# Altium PCB LD-Shoushi-V2.31-0907.pcbdoc
Units mil, origin at the board's own origin, x right, y up, seen from the top; angles counter-clockwise.
Board outline 2992.13 x 2992.13 mil, 4 copper layers (Top Layer, GND, SIGNAL, Bottom Layer), stack 67.335 mil thick; 68 components, 47 nets, 220 pads, 80 vias.
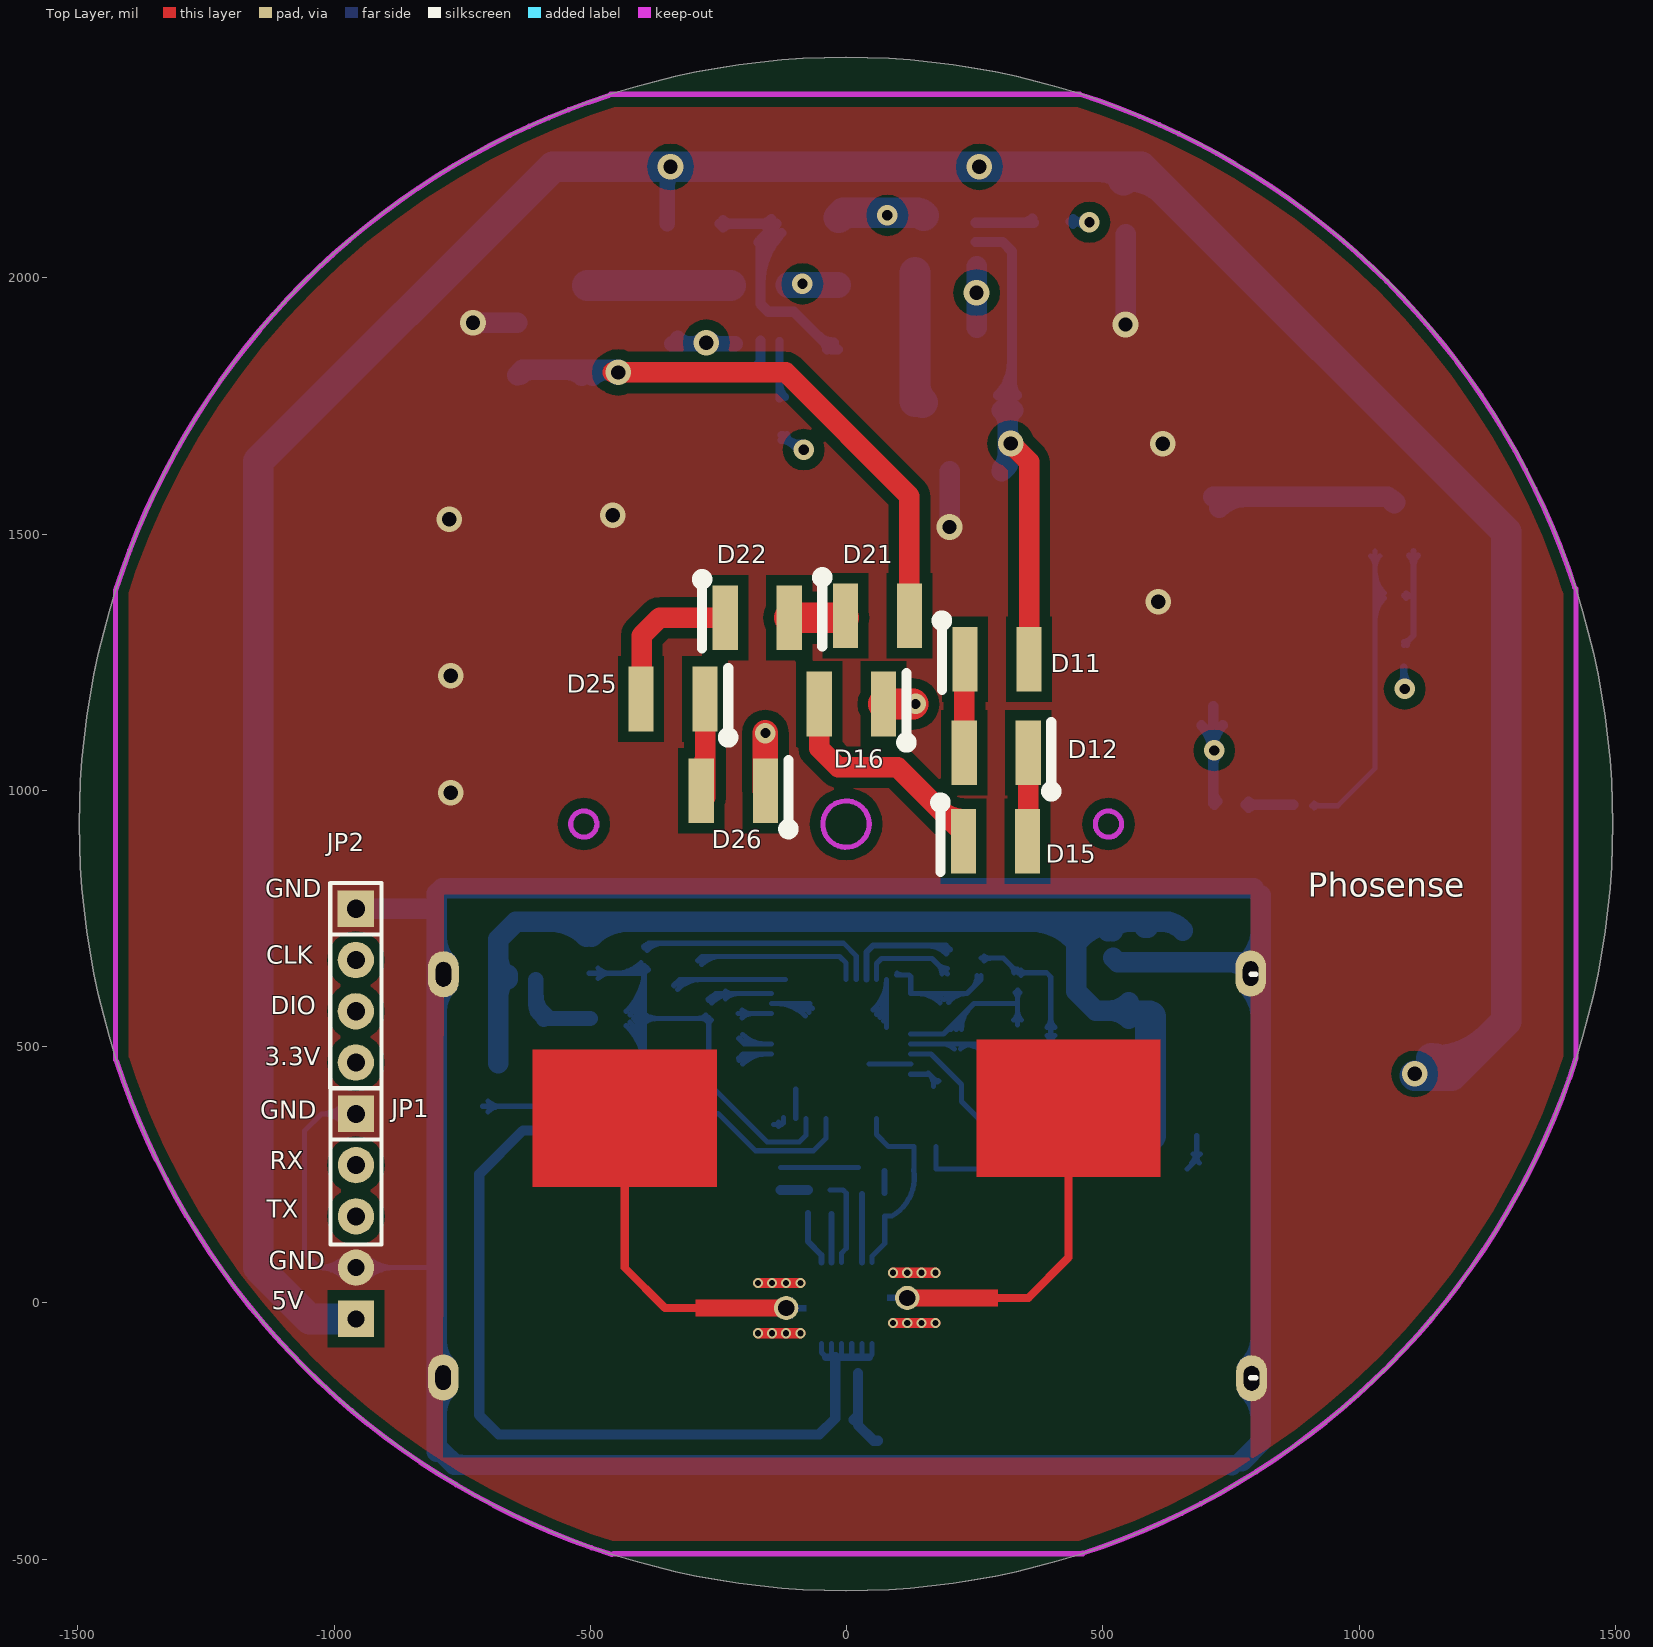
[diagram p0: Top Layer view]
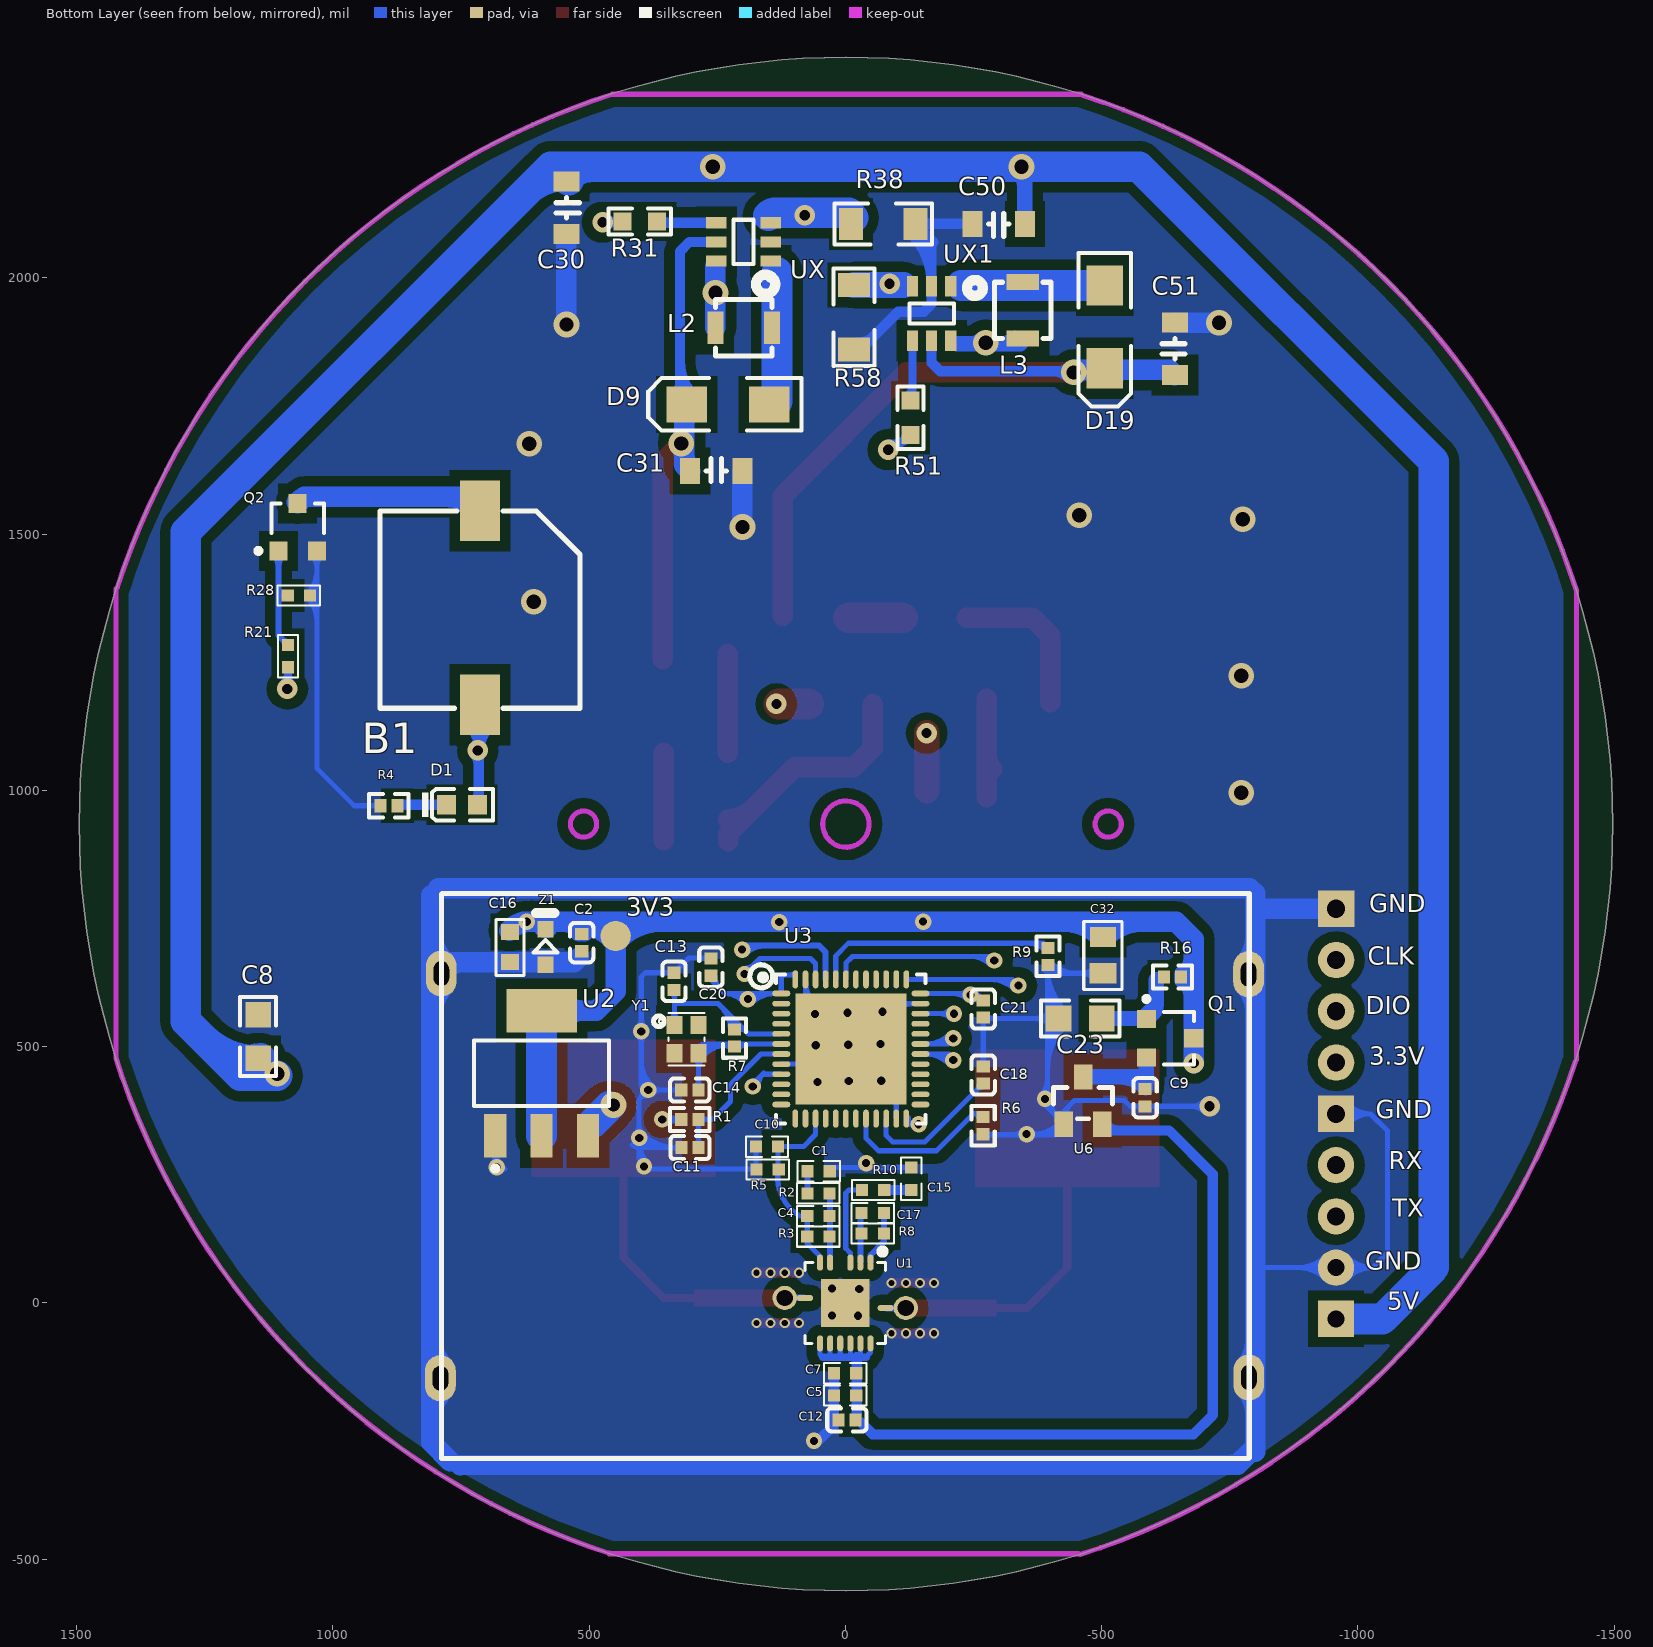
[diagram p1: Bottom Layer view, seen from below]
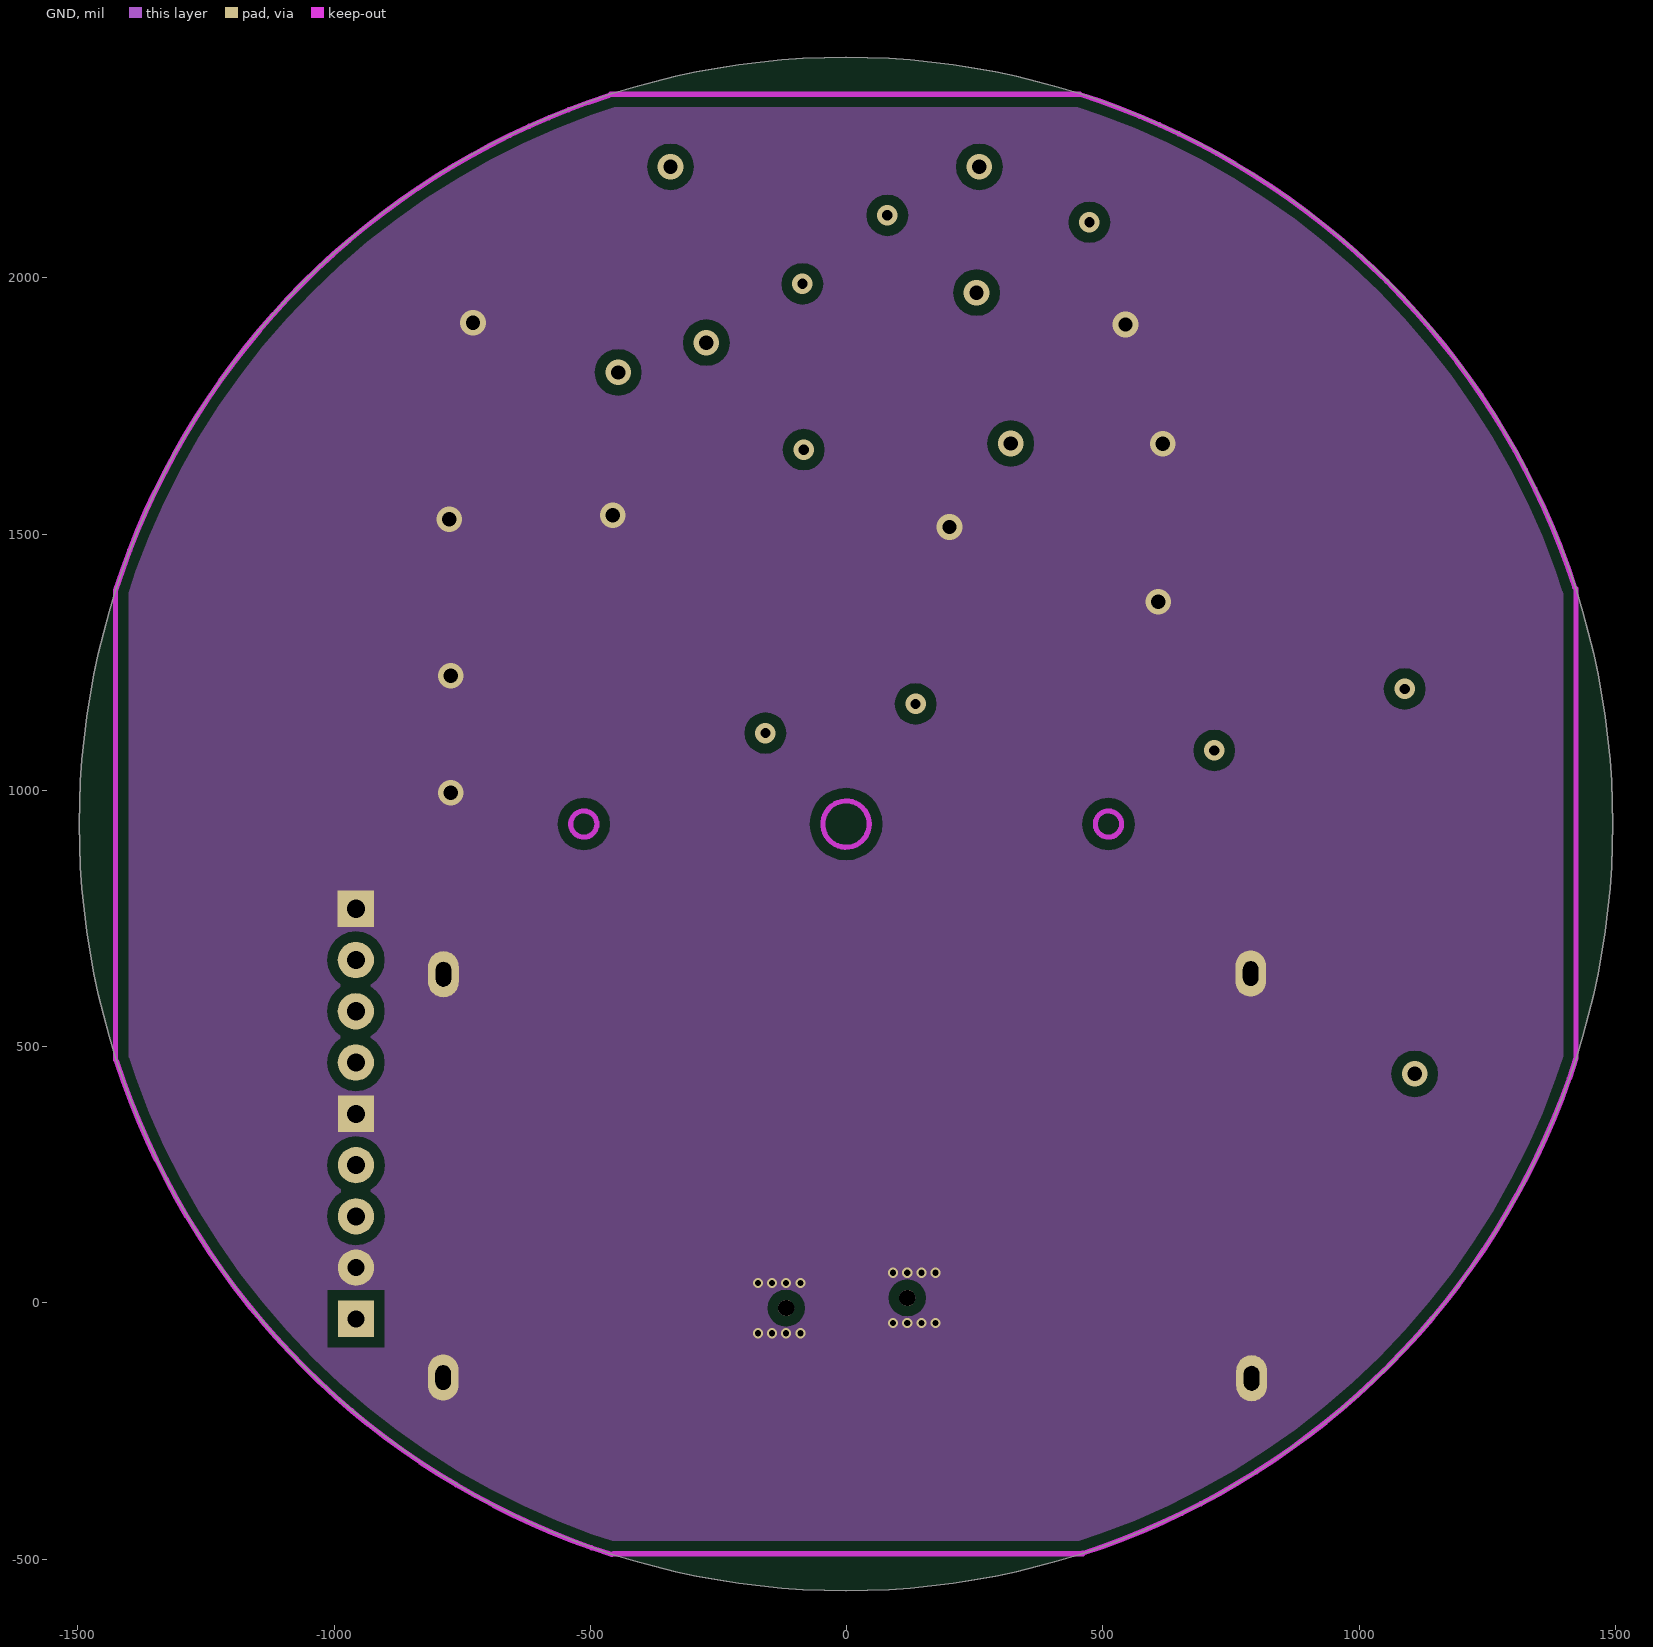
[diagram p2: GND]
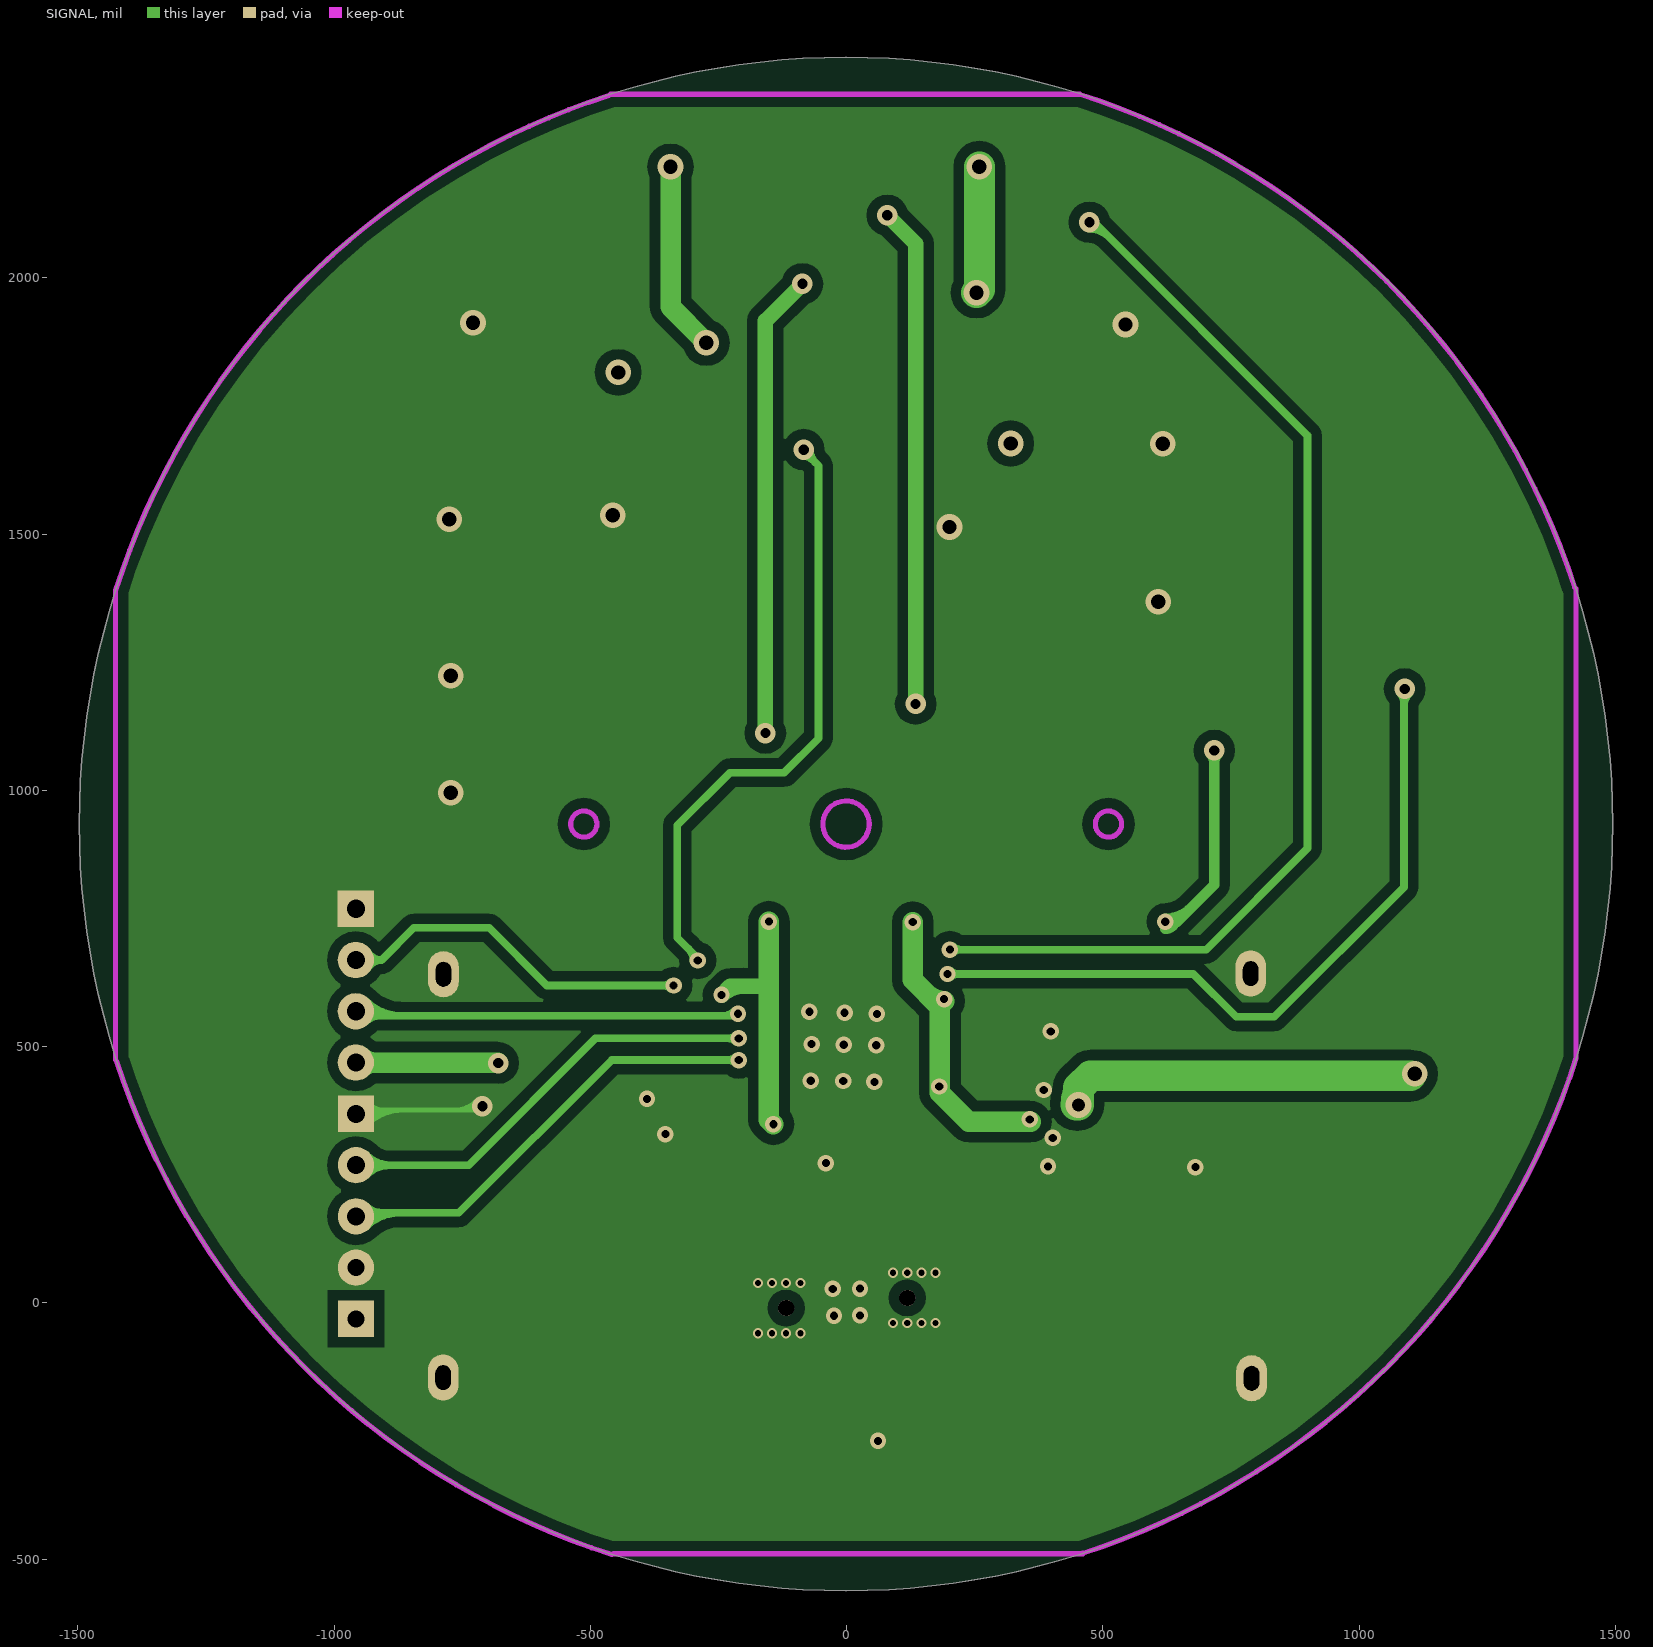
[diagram p3: SIGNAL]

## Layer stack, top to bottom
Top Layer: signal copper 1.4
Dielectric: core 36.5354, FR-4, Dk 4.8
GND: signal copper 1.4
Dielectric: prepreg 12.6, FR-4, Dk 4.8
SIGNAL: signal copper 1.4
Dielectric: core 12.6, FR-4, Dk 4.8
Bottom Layer: signal copper 1.4

## Board outline
-1497.47,934.6 ccw(c-1.41,934.6) -1.41,-561.46 ccw(c-1.41,934.6) 1494.66,934.6 ccw(c-1.41,934.6) -1.41,2430.66 ccw(c-1.41,934.6)

## Design rules (kind name [scope] priority, off if disabled: settings)
Clearance Clearance_1 [All] p1: gap=7
Clearance [InNet('GND')] p2: gap=7
ComponentClearance [All] p1: gap=10 collisioncheckmode=3 verticalgap=10
PolygonConnect [All] p1: connectstyle=Direct reliefconductorwidth=10 reliefentries=4 polygonreliefangle="90 Angle"
RoutingLayers [All] p1: top layer_v5=TRUE mid layer 1_v5=FALSE mid layer 2_v5=TRUE bottom layer_v5=TRUE
RoutingVias [All] p1: holewidth=28 width=50 viastyle="Through Hole" minholewidth=15 minwidth=20 maxholewidth=28 maxwidth=50
SolderMaskExpansion [All] p1: expansion=4
TestPointUsage FabricationTestPointUsage [All] p1: valid=0 allowmultiple=FALSE
Testpoint FabricationTestpoint [(IsPad And (OnTopLayer Or OnBottomLayer))] p1: side=3 testpointundercomponent=TRUE minsize=40 maxsize=100 preferedsize=60 minholesize=0 maxholesize=40 preferedholesize=32 testpointgrid=1 style=297 order=0123456789
Width [All] p1: maxlimit=80 minlimit=10 preferedwidth=10
17 further rules are at their usual default settings.

## Components (designator, comment, footprint, x,y, rotation, side; value= is the part's Value field where it differs from the comment)
3V3 "TEST POINT" TP-1.5 448.09,716.1 r270 bottom
B1 "BEEP-C255327" C255327-Beep 712.79,1545.5 r270 bottom
C1 "4.7uF" C0402 51.9,257.1 r180 bottom
C2 "10uF" LC-0402_C#1 514.29,703 r90 bottom (schematic designator C18)
C4 "1nF" C0402 52.53,169.41 r180 bottom
C5 "0.5pF" C0402 0.2,-180.3 r0 bottom
C7 "100nF" C0402 0.2,-137.1 r0 bottom (schematic designator C5)
C8 "10uF/16V" C0805 1145.59,519.9 r90 bottom
C9 "10uF" LC-0402_C#1 -585.11,400.5 r90 bottom
C10 "100nF" C0402 152.7,305 r0 bottom (schematic designator C20)
C11 "100nF" LC-0402_C#1 302.99,303.2 r180 bottom
C12 "10uF" LC-0402_C#1 -3.2,-228 r180 bottom
C13 "22pF" LC-0402_C#1 333.99,627.6 r270 bottom
C14 "22pF" LC-0402_C#1 303.39,415.6 r180 bottom
C15 "1nF" C0402 -128.8,242.5 r270 bottom
C16 "0.1uF/50V" 0603#1 654.19,665 r0 bottom
C17 "1nF" C0402 -53.67,175.61 r180 bottom
C18 "2.2UF" LC-0402_C#1 -269.21,444.9 r90 bottom
C20 "10uF/6.3V" LC-0402_C#2 262.29,655.3 r270 bottom
C21 "0.1uF/50V" LC-0402_C#2 -269.21,573.6 r90 bottom
C23 "47uF/6.3V" C0805 -458.31,555.2 r0 bottom
C30 "0.1uF/50V" 0805C 543.99,2136.7 r270 bottom
C31 "0.1uF/50V" 0805C 251.79,1623.1 r180 bottom
C32 "47uF/6.3V" 0805 -502.71,643.3 r0 bottom
C50 "0.1uF/50V" 0805C -299.31,2105.6 r0 bottom
C51 "0.1uF/50V" 0805C -643.11,1861.7 r90 bottom
D1 "红灯" LC-0603_LED_S1 747.69,972.2 r180 bottom
D9 "SS110" SMA 227.89,1758.2 r0 bottom
D11 "LED1" 3528 355.69,1256.4 r180 top
D12 "LED1" 3528 229.19,1073.4 r0 top
D15 "LED1" 3528 352.89,901.3 r180 top
D16 "LED1" 3528 -53.5,1168.7 r0 top
D19 "SS110" SMA -501.21,1905.7 r270 bottom
D21 "LED1" 3528 122.39,1340.9 r180 top
D22 "LED1" 3528 -112.21,1337 r180 top
D25 "LED1" 3528 -401.4,1178.5 r0 top
D26 "LED1" 3528 -283.71,999.7 r0 top
JP1 "PH2.0-3P" 1X3-2.54 -957.51,369 r270 top locked
JP2 "SWD" SIP4-2.54 -879.81,848.2 r270 top locked
L2 "VLF3010AT-220MR33" VLF3010AT-220MR33 253.29,1902.8 r180 bottom
L3 "VLF3010AT-220MR33" VLF3010AT-220MR33 -346.31,1881.7 r90 bottom
Q1 "8050" SOT-23#1 -628.81,516.5 r270 bottom
Q2 "8050" SOT-23#1 1068.49,1508.8 r180 bottom
R1 "4.7KΩ" LC-0402_R#1 303.29,358.2 r0 bottom
R2 "2k" R0402 52.4,214 r180 bottom
R3 "1M" R0402 52.53,129.41 r180 bottom
R4 "1KΩ" LC-0402_R#1 890.49,970.3 r180 bottom (schematic designator R15)
R5 "47k" R0402 151.5,260.2 r0 bottom
R6 "10KΩ" LC-0402_R#1 -269.01,346 r90 bottom
R7 "10MΩ" LC-0402_R#1 215.99,516.9 r270 bottom
R8 "5.1k" R0402 -53.67,135.61 r180 bottom
R9 "10KΩ" LC-0402_R#1 -395.41,676.3 r90 bottom
R10 "5.1k" R0402 -54.47,220.71 r180 bottom
R16 "5.1K" LC-0402_R#2 -638.51,636.1 r0 bottom
R21 "2K" R0402 1087.09,1262.2 r90 bottom
R28 "2K" R0402 1066.09,1380.2 r0 bottom
R31 "100R" 0603#2 365.89,2110.3 r0 bottom
R38 "20K" 1206 -74.11,2105.1 r180 bottom
R51 "100R" 0603#2 -127.21,1762.1 r270 bottom
R58 "20K" 1206 -16.81,1923.2 r270 bottom
U1 "XBR816" QFN24-1 0,0 r270 bottom
U2 "LM1117_3V3" SOT223 592.49,448.5 r180 bottom
U3 "STM32F401CCU6" UFQFPN-48_L7.0-W7.0-P0.50-BL-EP -10.91,495.6 r270 bottom
U6 "ME6216A12M3G" SOT-23#2 -426.71,348.7 r270 bottom
UX "AP3127B-SOT23-6" SOT23-6 198.69,2070.3 r0 bottom
UX1 "AP3127B-SOT23-6" SOT23-6 -168.41,1930.7 r270 bottom
Y1 "25MHZ" OSC-SMD_4P-L2.0-W1.6-BL 309.79,514.7 r270 bottom
Z1 "ESD5Z5.0T1G" SOD323 584.69,741.01 r270 bottom

## Footprints (in the part's own frame and the unit in brackets; to place one, negate y for a bottom-side part, rotate by r counter-clockwise, add the part's x,y. Pads: shape width x height; smd on the part's side, far side on the other; paste and mask are expansions set on the pad)
1X3-2.54 [mm] "1X3-2.54"
  rect 1.8x1.8 hole 0.9: 1(0,0)
  round 1.8 hole 0.9: 2(2.54,0) 3(5.08,0)
  silkscreen extent -1.27,-1.27 6.48,1.27
0603#1 [mm]
  rect 0.9x0.8 smd: 1(0,0) 2(0,-1.5)
  silkscreen extent -0.7,-2.12 0.7,0.65
0603#2 [mm]
  rect 0.889x0.889 smd: 1(0.039,0) 2(1.739,0)
  silkscreen extent -0.66,-0.65 2.43,0.65
0805 [mm]
  rect 1.35x1 smd: 1(0,0)
  rect 1.3x1 smd: 2(0,-1.8)
  silkscreen extent -0.95,-2.58 0.95,0.8
0805C [mil]
  rect 39x51 smd: 1(-51.18,0)
  rect 39.37x51 smd: 2(51.18,0)
  silkscreen extent -20,-20 20,25
1206 [mm]
  rect 1.2x1.6 smd: 1(-1.6,0) 2(1.6,0)
  silkscreen extent -2.41,-1.02 2.41,1.02
3528 [mm] "3528LED"
  rect 1.25x3.2 smd: 1(0,0) 2(3.175,0)
  silkscreen extent 4.19,-2.03 4.44,1.52
C0402 [mm]
  rect 0.6x0.6 smd: 1(-0.55,0) 2(0.55,0)
  silkscreen extent -1.05,-0.5 1.05,0.5, body extent -0.5,-0.3 0.5,0.3, height 0.2
C0805 [mil]
  rect 50x50 smd: 1(-42.28,0) 2(42.28,0)
  silkscreen extent -77,-35 77,35, body extent -39,-24 39,24, height 47
C255327-Beep [mm] "C255327-Beep"
  rect 3x2 smd: 1(9.6,0) 2(0,0)
  silkscreen extent 0,-4.95 9.78,4.95
LC-0402_C#1 [mm]
  rect 0.6x0.65 smd mask+0.051: 1(-0.425,0) 2(0.425,0)
  silkscreen extent -0.97,-0.58 0.97,0.58, body extent -0.48,-0.3 0.52,0.3, height 0.2
LC-0402_C#2 [mm]
  rect 0.6x0.65 smd: 1(-0.425,0) 2(0.425,0)
  silkscreen extent -0.97,-0.58 0.97,0.58, body extent -0.48,-0.3 0.52,0.3, height 0.2
LC-0402_R#1 [mm]
  rect 0.6x0.65 smd mask+0.051: 1(-0.425,0) 2(0.425,0)
  silkscreen extent -0.97,-0.58 0.97,0.58, body extent -0.57,-0.27 0.58,0.28, height 0.41
LC-0402_R#2 [mm]
  rect 0.6x0.65 smd: 1(-0.425,0) 2(0.425,0)
  silkscreen extent -0.97,-0.58 0.97,0.58, body extent -0.57,-0.27 0.58,0.28, height 0.41
LC-0603_LED_S1 [mm]
  rect 0.93x0.98 smd: A(0.77,0) K(-0.77,0)
  silkscreen extent -1.97,-0.79 1.54,0.79, body extent -0.8,-0.4 0.8,0.4, height 0.6
OSC-SMD_4P-L2.0-W1.6-BL [mm]
  rect 0.9x0.8 smd: 1(-0.7,-0.6) 2(0.7,-0.6) 3(0.7,0.6) 4(-0.7,0.6)
  silkscreen extent -1.3,-1.37 1.3,0.9
QFN24-1 [mm] "QFN24"
  oval 0.8x0.3 smd: 1(-2,1.25) 2(-2,0.75) 3(-2,0.25) 5(-2,-0.75) 6(-2,-1.25) 13(2,-1.25) 14(2,-0.75) 15(2,-0.25) 16(2,0.25) 17(2,0.75) 18(2,1.25)
  oval 0.3x0.8 smd: 9(-0.25,-2) 21(0.25,2)
  rect 2.4x2.4 smd: 25(0,0)
  silkscreen extent -2.7,-2 2,2, body extent -2,-2 2,2, height 1
R0402 [mm]
  rect 0.6x0.6 smd: 1(-0.55,0) 2(0.55,0)
  silkscreen extent -1.05,-0.5 1.05,0.5, body extent -0.49,-0.25 0.51,0.25, height 0.35
SIP4-2.54 [mm]
  rect 1.8x1.8 hole 0.9: 1(2.007,-1.981)
  round 1.8 hole 0.9: 2(4.547,-1.981) 3(7.087,-1.981) 4(9.627,-1.981)
  silkscreen extent 0.74,-3.25 10.9,-0.71
SMA [mm]
  rect 2x1.8 smd: 1(-2.025,0.127) 2(2.075,0.127)
  silkscreen extent -3.62,-1.17 3.98,1.43
SOD323 [mm]
  rect 0.8x0.8 smd: A(2.06,0) K(0.3,0)
  silkscreen extent 0.84,-0.6 1.44,0.6, body extent -0.17,-0.62 2.53,0.63, height 1.1
SOT23-6 [mm] "SOT23-6"
  rect 1x0.55 smd: 1(-1.35,0.95) 2(-1.35,0) 3(-1.35,-0.95) 4(1.35,-0.95) 5(1.35,0) 6(1.35,0.95)
  silkscreen extent -1.47,-1.1 0.5,1.9
SOT223 [mm] "SOT-223/SC-73; 4 Leads; Body 6.7 x 7.3 mm, inc. leads (LxW max)"
  rect 1.1x2.15 smd: 1(-2.3,-3.1) 2(0,-3.1) 3(2.3,-3.1)
  rect 3.5x2.15 smd: 2(0,3.1)
  silkscreen extent -3.35,-4.85 3.35,1.63
SOT-23#1 [mm]
  rect 0.9x0.95 smd: 1(-0.95,-1.048) 2(0.95,-1.048) 3(0,1.302)
  silkscreen extent -2.07,-1.17 1.3,1.3
SOT-23#2 [mm]
  rect 1.25x0.914 smd: 1(0,0) 2(0,1.9) 3(-2.348,0.95)
  silkscreen extent -1.82,-0.51 -0.27,2.41, body extent -2.67,-0.55 0.33,2.45, height 1.3
TP-1.5 [mm]
  round 1.5 smd: 1(0,0)
UFQFPN-48_L7.0-W7.0-P0.50-BL-EP [mm]
  oval 0.28x0.896 smd: 1(-2.751,-3.449) 2(-2.25,-3.449) 3(-1.75,-3.449) 4(-1.25,-3.449) 5(-0.749,-3.449) 6(-0.249,-3.449) 7(0.249,-3.449) 8(0.749,-3.449) 9(1.25,-3.449) 10(1.75,-3.449) 11(2.25,-3.449) 12(2.751,-3.449) 25(2.751,3.449) 26(2.25,3.449) 27(1.75,3.449) 28(1.25,3.449) 29(0.749,3.449) 30(0.249,3.449) 31(-0.249,3.449) 32(-0.749,3.449) 33(-1.25,3.449) 34(-1.75,3.449) 35(-2.25,3.449) 36(-2.751,3.449)
  oval 0.896x0.28 smd: 13(3.449,-2.751) 14(3.449,-2.25) 15(3.449,-1.75) 16(3.449,-1.25) 17(3.449,-0.749) 18(3.449,-0.249) 19(3.449,0.249) 20(3.449,0.749) 21(3.449,1.25) 22(3.449,1.75) 23(3.449,2.25) 24(3.449,2.751) 37(-3.449,2.751) 38(-3.449,2.25) 39(-3.449,1.75) 40(-3.449,1.25) 41(-3.449,0.749) 42(-3.449,0.249) 43(-3.449,-0.249) 44(-3.449,-0.749) 45(-3.449,-1.25) 46(-3.449,-1.75) 47(-3.449,-2.25) 48(-3.449,-2.751)
  rect 5.5x5.5 smd: 49(0,0)
  silkscreen extent -3.7,-4.5 3.7,3.7
VLF3010AT-220MR33 [mm] "VLF3010AT-220MR33"
  rect 0.8x1.6 smd: 1(0,0) 2(2.8,0)
  silkscreen extent 0,-1.4 2.79,1.4

## Part data
3V3: library part TEST-POINT, "测试点"
B1: library part BEEP
C1 C4 C5 C7 C8 C10 C15 C16 C17 C23 C32: library part Cap, "Capacitor"
C2 C9 C12 C20 C21: library part "0402 10uF (106) 20% 6.3V", "贴片电容"
C11: library part "0402 100nF (104) 10% 16V", "贴片电容"
C13 C14: library part "0402 22pF (220) 5% 50V", "贴片电容"
C18: library part "0402 2.2nF (222) 10% 50V", "贴片电容"
C30 C31 C50 C51: library part "Cap Semi", "Capacitor (Semiconductor SIM Model)"
D1: library part "0603 红灯", "发光二极管"
D9 D19: library part "Diode 1N4007", "1 Amp General Purpose Rectifier"
D11 D12 D15 D16 D21 D22 D26: library part 亿光/科达5730, "Typical RED GaAs LED"
D25: "Typical RED GaAs LED"
JP1: library part "Header 3", "Header, 3-Pin"
JP2: library part "Header 4", "4P接插件"
L2 L3: library part CD4022
Q1 Q2: library part 2N3904, "NPN General Purpose Amplifier"
R1: library part "0402 4.7KΩ (4701) 1%", "贴片电阻"
R2 R3 R5 R8 R10 R21 R28 R31 R51: library part Res2, "Resistor"
R4: library part "0402 1KΩ (1001) 1%", "贴片电阻"
R6 R9 R16: library part "0402 10KΩ (1002) 1%", "贴片电阻"
R7: library part "0402 10MΩ (1005) 1%", "贴片电阻"
R38 R58: library part RES
U1: library part XBR1000_24_1
U2: library part SPX1117
U3: "ARM Cortex-M4 32-bit MCU+FPU, 105 DMIPS, 256 kB Flash, 64 kB Internal RAM, 36 I/Os, 48-pin UFQFPN, -40 to 85 degC, Tray"
U6: library part SSP6206
Y1: library part "SMD-3225_4P  25MHZ 12PF 10PPM", "贴片晶振"
Z1: library part "D Zener", "Zener Diode"

## Free pads (board coordinates)
  oval 60x90 hole 30 slot 48 at 90 deg: 0(-786.81,641.4) 1(-787.41,-145.5) 2(789.99,-146.9) 3(788.19,642.6)
  rect 70.87x70.87 hole 33.46: 1(-957.51,-31)
  round 70.87 hole 33.46: 1(-957.51,69)
  round 47.24 / inner round 31.5 / far side round 47.24 hole 31.5: 1(-118.11,-9.84) 1(118.11,9.84)

## Via types
v1: diameter 32, hole 16, SIGNAL to Bottom Layer, 37 vias
v2: diameter 50, hole 28, Top Layer to Bottom Layer, 16 vias
v3: diameter 19.68, hole 11.81, Top Layer to Bottom Layer, 16 vias
v4: diameter 40, hole 20, Top Layer to Bottom Layer, 8 vias
v5: diameter 40, hole 20, SIGNAL to Bottom Layer, 2 vias
v6: diameter 50, hole 25, SIGNAL to Bottom Layer, 1 vias

## Nets (pads, with @x,y where several pads share a name; then routed paths per layer and width w, separated by ;. In a path a pad name is that pad's centre, name@x,y a point inside that pad or via, vN(x,y) a via of type N, cw(c..) or ccw(c..) an arc to the next point about the centre after c; other vN are vias at no path point)
1.2V: C5.1 C7.1 C12.2 U1.13 U1.14 U1.15 U1.16 U1.17 U1.18 U6.2 | length 1846.7
  Bottom Layer w10: U1.18 -49.21,-96.69 -40.3,-105.6 ; -29.53,-104.77 U1.17 ; -9.84,-105.46 U1.16 ; 9.84,-104.94 U1.15 ; 29.53,-103.97 U1.14 ; 43.9,-105.6 49.21,-100.29 U1.13
  Bottom Layer w15: -40.3,-105.6 -22.5,-105.6 43.9,-105.6
  Bottom Layer w20: -534.09,336.6 ccw(c-534.09,374.67) U6.2@-507.17,347.75 ; U6.2 -513.61,336.6 -631.81,336.6 -717.11,251.3 -717.11,-218.7 -679.41,-256.4 -53.47,-256.4 -22.5,-225.43 -22.5,-105.6
3.3V: 3V3.1 B1.1 C2.2 C16.2 C20.2 C21.2 C32.2 D1.A JP2.4 Q1.3 R1.2 R16.1 U2.2 U3.1 U3.9 U3.24 U3.36 U3.48 Z1.K | length 6120.5
  SIGNAL w20: v1@621.39,730 ccw(c621.39,753.18) 637.78,736.79 ; v1(621.39,744) 644.99,744 717.09,816.1 v4(717.09,1078.1) ; v1@621.39,750 ccw(c621.39,821.46) 671.92,770.93 ; v4@710.02,1071.03 cw(c692.95,1053.96) 717.09,1053.96 cw(c741.23,1053.96) v4@724.16,1071.03
  SIGNAL w30: v1(-244.41,601.1) -227.31,618.2 -169.91,618.2 ; v1@-243.7,600.39 cw(c-200.71,557.4) -200.71,618.2
  SIGNAL w40: JP2.4 v5@-681.07,469.2 ; JP2.4@-946.9,458.29 cw(c-920.55,431.94) -920.55,469.2 cw(c-920.55,506.46) JP2.4@-946.9,480.11 ; v1(-151.81,744.2) -151.81,357.3 v1(-143.11,348.6) ; v1(128.89,743.1) 128.89,630.4 181.69,577.6 181.69,410.5 238.39,353.8 v1@359.29,353.8 ; 156.36,602.93 ccw(c189.99,636.56) v1@189.99,589
  Bottom Layer w10: C21.2@-270.48,592.59 cw(c-243.17,565.28) v1@-243.17,603.9 ; C21.2 -255.64,603.9 U3.36 ; C21.2@-264.37,595.17 cw(c-250.37,581.17) v1@-244.69,600.14 ; C21.2@-263.41,585.52 cw(c-219.03,541.13) -219.03,603.9 ; v1@-236.63,593.32 cw(c-211.09,567.78) -211.09,603.9 ; v1@-236.63,608.88 ccw(c-224.61,620.9) -224.61,603.9 ; v1(-143.11,348.6) -126.01,348.6 ; v1@-133.1,344.04 cw(c-126.01,340.81) -126.01,348.6 ; v1@-133.1,353.16 ccw(c-126.01,356.39) -126.01,348.6 ; U3.24@-123.31,361.4 -123.31,351.3 -126.01,348.6 ; U3.48@97.19,640.3 121.79,640.3 124.89,637.2 U3.1 234.79,603.9 ; U3.48@97.75,643.88 ccw(c106.4,652.53) 106.4,640.3 ; U3.9 161.69,446.4 v1@176.59,431.5 ; U3.1@137.12,603.9 cw(c137.12,540.13) v1@182.21,585.22 ; 159.04,449.05 cw(c133.99,424) v1@169.4,422.78 ; 161.26,603.9 cw(c161.26,564.27) v1@189.29,592.29 ; 170.66,437.43 ccw(c180.39,447.16) v1@180.39,433.4 ; v1@190.78,592.39 cw(c214.33,574.05) 214.33,603.9 ; v1@198.67,586.24 cw(c234.79,558.13) 234.79,603.9 ; 243.92,613.02 ccw(c218.37,638.57) C20.2@254.5,638.57 ; C20.2 262.29,631.4 234.79,603.9
  Bottom Layer w15: R1.2 v1(357.09,358.2) ; v1@351.08,352.19 ccw(c336.57,337.68) 336.57,358.2 ccw(c336.57,378.72) v1@351.08,364.21
  Bottom Layer w20: B1.1@692.02,1127.09 cw(c636.58,1071.65) v4@714.99,1071.65 ; 714.99,999 ccw(c743.19,999) D1.A@723.25,979.06 ; 714.99,1048.89 cw(c746.3,1048.89) v4@724.16,1071.03 ; v4@714.99,1082.27 cw(c778.39,1082.27) B1.1@733.56,1127.09 ; 714.99,1107.31 ccw(c746.3,1107.31) v4@724.16,1085.17 ; B1.1@714.99,1164.3 714.99,974.58 D1.A
  Bottom Layer w40: v5(-680.07,468.2) -680.07,709.34 -645.41,744 v1(621.39,744) cw(c621.39,701.62) C16.2@655.66,726.56 ; -680.07,594.95 cw(c-615.07,594.95) R16.1@-661.03,640.91 ; -680.07,677.25 ccw(c-615.07,677.25) R16.1@-661.03,631.29 ; -579.88,744 cw(c-579.88,642.9) C32.2@-508.39,714.39 ; C32.2@-497.03,714.39 cw(c-425.54,642.9) -425.54,744 ; 357.73,744 cw(c357.73,625.74) 3V3.1@441.36,709.36 ; 426.54,737.65 cw(c441.88,722.31) 3V3.1@441.88,744 ; 3V3.1@454.3,744 cw(c454.3,722.31) 469.64,737.65 ; 3V3.1@454.83,709.36 cw(c538.45,625.74) 538.45,744 ; 3V3.1@465.99,734 3V3.1 448.09,608.5 486.04,570.55 U2.2@592.49,570.55 ; 474.49,744 cw(c474.49,680.92) C2.2@519.1,725.52 ; C2.2@509.49,725.52 cw(c554.09,680.92) 554.09,744 ; U2.2@550.13,554.76 ccw(c512.03,516.66) 512.03,570.55 ccw(c512.03,624.44) U2.2@550.13,586.33 ; 559.23,744 cw(c559.23,703.74) Z1.K@587.7,732.21 ; Z1.K@581.69,732.21 cw(c610.15,703.74) v1@610.15,744 ; v1@614.34,744 cw(c614.34,686.17) C16.2@655.23,727.06
  Bottom Layer w60: U2.2@592.49,326.45 U2.2@592.49,558.8
  other v1: 180.39,422.4 189.99,593
3V_LD: C9.2 Q1.2 U6.3 | length 227.5
  Bottom Layer w30: -587.55,429.54 Q1.2 ; C9.2@-586.38,419.49 cw(c-534.14,367.25) -534.14,441.13 ; -584.03,441.13 U6.3
5V: C8.1 C30.1 C50.1 L2.1 L3.1 pad.1@-957.51,-31 U2.3 UX1.6 UX.6 | length 8316.2
  SIGNAL w40: v2(-343.81,2216.9) -343.81,1943.8 v2(-273.81,1873.8)
  SIGNAL w60: v2(253.29,1971.4) 258.89,1977 v2(258.89,2216.9) ; v6@447.29,386.4 cw(c517.06,386.4) 467.73,435.74 ; v6(452.29,386.4) 452.29,420.3 475.29,443.3 v2@1100.19,443.3
  Bottom Layer w30: v2@-351.11,2216.9 -350.49,2216.28 C50.1 ; -350.49,2176.63 cw(c-303.54,2176.63) v2@-336.74,2209.83 ; L3.1@-342.01,1871.3 -217.81,1871.3 ; L3.1@-330.03,1882.23 ccw(c-303.65,1908.61) -303.65,1871.3 ; -303.99,1871.3 ccw(c-303.99,1903.98) v2@-280.88,1880.87 ; v2@-266.74,1880.87 ccw(c-243.63,1903.98) -243.63,1871.3
  Bottom Layer w40: L2.1 UX.6@253.29,2022.7
  Bottom Layer w60: pad.1@-957.51,-31 -1047.91,-31 -1148.41,69.5 -1148.41,1641.8 -573.31,2216.9 574.49,2216.9 ; v6@460.59,383.3 U2.3@491.69,352.2 ; 493.28,2216.9 cw(c493.28,2143.17) C30.1@545.42,2195.31 ; C30.1@539.89,2190.75 cw(c574.49,2180.94) 574.49,2216.9 ; C30.1@544.5,2196.83 cw(c568.64,2157.53) 601.25,2190.14 ; C30.1@549.99,2198.38 cw(c549.99,2094.52) 623.43,2167.96 ; C8.1@1140.65,476.85 ccw(c1179.89,483.02) 1179.89,443.3 ; C8.1@1145.59,472.62 ccw(c1145.59,626.23) 1254.21,517.61 ; C8.1@1150.45,476.43 cw(c1108.19,486.81) 1108.19,443.3 1179.89,443.3 ; 574.49,2216.9 1286.89,1504.5 1286.89,550.3 1179.89,443.3
  other v2: 1108.19,447
AD: C4.1 C10.1 R3.1 R5.1 U1.6 U3.15 | length 380.5
  Bottom Layer w10: U1.6 49.21,91.31 74.19,116.29 C4.1 87.51,169.41 ccw(c45.56,244.95) R5.1@130.59,260.33 ; U3.15 57.99,328.5 81.49,305 C10.1 R5.1@131.05,260.33
BLUE_LED: U3.10
BOOT0: R9.2 U3.44 | length 528.2
  Bottom Layer w10: R9.2@-396.68,695.29 cw(c-380.71,679.32) -380.71,701.9 ; R9.2 -386.54,701.9 -6.01,701.9 18.59,677.3 U3.44 ; R9.2@-389.61,688.22 cw(c-356.57,655.18) -356.57,701.9
BOOT1: R6.2 U3.20 | length 320.5
  Bottom Layer w10: R6.2@-267.71,369.63 -250.84,369.63 ; R6.2@-261.38,361.22 cw(c-250.84,358.82) -250.84,369.63 ; U3.20 -40.41,321.4 -64.81,297 -178.21,297 -250.84,369.63
BUZZER: R21.1 U3.46 | length 1816
  SIGNAL w15: v1(196.59,642) 676.19,642 759.89,558.3 834.39,558.3 1087.39,811.3 v4@1087.39,1201.2 ; v1@202.6,635.99 cw(c217.11,621.48) 217.11,642 cw(c217.11,662.52) v1@202.6,648.01 ; v4@1079.75,1189.26 cw(c1061.31,1170.82) 1087.39,1170.82 ; 1087.39,1165.03 cw(c1121.67,1165.03) v4@1097.43,1189.26
  Bottom Layer w10: U3.46 57.99,662.2 68.09,672.3 166.29,672.3 v1(196.59,642) ; v1@185.59,642 ccw(c159.04,642) 177.81,660.78 ccw(c196.59,679.56) v1@196.59,653
  Bottom Layer w15: v4@1079.75,1206.94 ccw(c1062.04,1224.66) 1087.09,1224.66 ; v4@1087.09,1199.6 R21.1 ; R21.1@1087.09,1231.9 ccw(c1122.39,1231.9) v4@1097.43,1206.94
  other v4: 1088.59,1198.1
FB_0.25V: D16.2 R38.1 UX.3 | length 1216.1
  Top Layer w60: D16.2 v4@129.89,1168.7
  SIGNAL w30: v4(79.29,2122.2) 134.39,2067.1 v4(134.39,1168.8)
  Bottom Layer w60: R38.1@-15.63,2117.48 cw(c7.83,2094.03) R38.1@7.83,2127.2 ; R38.1@-7.01,2127.2 132.49,2127.2 ; 135.9,2127.2 cw(c135.9,2106.92) 150.24,2121.26
FB_0.25V-1: D26.2 R58.1 UX1.3 | length 1115.8
  Top Layer w50: D26.2 v4(-158.71,1112.1)
  SIGNAL w30: v4(-158.71,1112.1) -158.71,1916.3 v4(-86.51,1988.5)
  Bottom Layer w50: -113.92,1986.19 R58.1
GND: C1.2 C2.1 C5.2 C7.2 C8.2 C9.1 C10.2 C11.1 C12.1 C13.1 C14.1 C15.1 C16.1 C18.2 C20.1 C21.1 C23.2 C30.2 C31.2 C32.1 C50.2 C51.2 JP1.1 JP2.1 pad.0 pad.1@-787.41,-145.5 pad.1@-957.51,69 pad.2 pad.3 Q2.2 R4.1 R5.2 R6.1 R9.1 R28.1 R38.2 R58.2 U1.25 U2.1 U3.8 U3.23 U3.35 U3.47 U3.49 U6.1 UX1.2 UX.2 Z1.A | length 15929.2
  Top Layer w19.68: v3(-173.23,-59.06) v3(-90.55,-59.06) ; v3(-173.23,39.37) v3(-90.55,39.37) ; v3(90.55,-39.37) v3(173.23,-39.37) ; v3(90.55,59.06) v3(173.23,59.06)
  SIGNAL w10: JP1.1@-953.81,376.3 -718.21,376.3 v5(-710.74,383.77) ; JP1.1@-950.13,361.63 cw(c-914.71,326.2) -914.71,376.3 ; JP1.1@-943.06,354.56 cw(c-890.56,302.06) -890.56,376.3 ; JP1.1@-935.99,347.48 cw(c-866.42,277.92) -866.42,376.3 ; JP1.1@-935.99,390.52 ccw(c-901.65,424.86) -901.65,376.3 ; -764.98,376.3 ccw(c-764.98,438.01) v5@-721.35,394.37 ; -740.84,376.3 ccw(c-740.84,413.87) v5@-714.28,387.3
  Bottom Layer w10: JP1.1@-980.36,348.91 ccw(c-1024.8,309.82) -1024.8,369 ; JP1.1@-980.36,389.1 cw(c-1024.8,428.18) -1024.8,369 ; pad.1@-979.4,47.86 ccw(c-1029.21,-0.24) -1029.21,69 ; pad.1@-979.4,90.15 cw(c-1029.21,138.25) -1029.21,69 ; JP1.1@-972.85,355.51 ccw(c-1002.69,329.27) -1002.69,369 ccw(c-1002.69,408.74) JP1.1@-972.85,382.5 ; pad.1@-972.21,54.81 ccw(c-1005.65,22.51) -1005.65,69 ccw(c-1005.65,115.5) pad.1@-972.21,83.2 ; JP1.1 -1024.8,369 ; pad.1@-943.06,54.56 cw(c-908.18,19.67) -908.18,69 cw(c-908.18,118.33) pad.1@-943.06,83.45 ; pad.1@-935.99,47.48 cw(c-884.04,-4.47) -884.04,69 cw(c-884.04,142.48) pad.1@-935.99,90.52 ; -801.9,69 -957.51,69 -1029.21,69 ; v5(-710.74,383.77) C9.1 -556.04,383.77 -544.51,395.3 -447.21,395.3 -426.71,374.8 U6.1 ; v5@-700.13,373.16 cw(c-674.53,347.55) -674.53,383.77 cw(c-674.53,419.98) v5@-700.13,394.37 ; C9.1@-590.91,378.95 ccw(c-602.54,367.32) -602.54,383.77 ccw(c-602.54,400.21) C9.1@-590.91,388.58 ; C9.1@-579.31,378.95 cw(c-567.68,367.32) -567.68,383.77 cw(c-567.68,400.21) C9.1@-579.31,388.58 ; C32.1 -396.21,643.3 ; C32.1@-485.43,632.92 cw(c-460.37,607.85) -460.37,643.3 cw(c-460.37,678.75) C32.1@-485.43,653.68 ; -452.11,643.3 ccw(c-452.11,715.28) R9.1@-401.21,664.38 ; -442.02,390.11 cw(c-472.29,359.84) U6.1@-429.69,355.6 ; U6.1@-431.66,337.14 ccw(c-410.31,358.5) U6.1@-410.31,328.3 ; C23.2@-430.17,541.06 cw(c-516.52,454.71) -394.41,454.71 ; C23.2@-430.17,569.34 ccw(c-516.52,655.69) R9.1@-394.41,655.69 ; -427.97,643.3 ccw(c-427.97,691.14) R9.1@-394.14,657.31 ; -427.09,375.18 cw(c-445.13,357.14) U6.1@-419.74,354.61 ; U6.1@-426.62,358.31 ccw(c-426.01,379.79) U6.1@-410.82,364.59 ; U6.1@-426.34,368.3 ccw(c-425.11,411.7) -394.41,381 ; U6.1@-424.59,344.22 ccw(c-386.16,382.64) -386.16,328.3 ; C23.2@-423.1,548.13 cw(c-492.38,478.85) -394.41,478.85 ; C23.2@-423.1,562.27 ccw(c-492.38,631.55) -394.41,631.55 ; U6.1@-417.52,351.29 ccw(c-362.02,406.78) v1@-362.02,328.3 ; U6.1@-417.32,358.08 ccw(c-457.44,398.2) v1@-400.71,398.2 ; U6.1@-413.71,355.31 cw(c-398.27,355.31) U6.1@-409.19,366.22 ; C23.2@-408.96,548.13 ccw(c-444.09,583.26) -394.41,583.26 ; C23.2@-408.96,562.27 cw(c-444.09,527.14) -394.41,527.14 ; -403.83,643.3 ccw(c-403.83,667) R9.1@-387.07,650.24 ; C23.2@-401.89,541.06 cw(c-367.75,506.92) -367.75,555.2 cw(c-367.75,603.48) C23.2@-401.89,569.34 ; -400.25,375.15 ccw(c-423.3,398.2) v1@-390.71,398.2 ; R9.1@-399.24,654.75 cw(c-410.9,643.09) -394.41,643.09 ; -394.41,380.37 cw(c-387.43,380.37) v1@-388.32,387.29 ; -394.41,436.1 ccw(c-351.8,436.1) v1@-381.93,405.98 ; -394.41,502.99 ccw(c-468.24,502.99) C23.2 ; -394.41,607.41 cw(c-468.24,607.41) C23.2 ; -394.41,643.16 cw(c-378.02,643.16) R9.1@-389.61,654.75 ; R9.1@-394.41,658.6 C23.2@-394.41,569.6 ; -383.4,328.3 ccw(c-383.4,359.29) v1@-361.49,337.38 ; -377.13,328.3 cw(c-377.13,306.18) v1@-361.49,321.82 ; v1@-345.93,321.82 cw(c-330.29,306.18) -330.29,328.3 ; v1@-345.93,337.38 ccw(c-324.01,359.29) -324.01,328.3 ; -290.66,555.2 ccw(c-290.66,577.34) C21.1@-275.01,561.68 ; -288.77,328.3 ccw(c-288.77,348.05) R6.1@-274.81,334.08 ; -284.1,328.3 cw(c-284.1,315.16) R6.1@-274.81,324.45 ; -282.61,555.2 cw(c-282.61,544.45) C21.1@-275.01,552.05 ; C18.2@-274.02,466.45 ccw(c-285.65,478.08) -269.21,478.08 ccw(c-252.76,478.08) C18.2@-264.39,466.45 ; C21.1@-274.02,552.05 cw(c-285.65,540.42) -269.21,540.42 cw(c-252.76,540.42) C21.1@-264.39,552.05 ; R6.1@-270.31,328.3 -406.31,328.3 U6.1 ; C18.2 C21.1@-269.21,555.2 ; C21.1 C21.1@-269.21,555.2 ; U3.35 U3.49@-71.41,584.2 ; U3.35@-138.23,584.2 cw(c-138.23,502.67) U3.49@-80.59,560.32 ; C15.1 C1.2@23.19,264.15 ; U3.49@-114.09,584.2 cw(c-114.09,526.82) U3.49@-73.52,567.39 ; U3.23 U3.49@-99.51,417.7 ; U3.49@-89.95,584.2 cw(c-89.95,550.96) U3.49@-66.44,574.46 ; U3.49@43.29,466.1 U3.8 ; U3.49@51.41,572.15 ccw(c-2.22,631.4) U3.47 U3.49@77.69,537.3 ; U3.49@58.12,564.74 ccw(c18.19,608.86) 77.69,608.86 ; U3.49@58.7,563 cw(c56.83,542.23) U3.49@77.69,542.23 ; U3.49@59.6,572.96 cw(c57.82,553.17) U3.49@77.69,553.17 ; U3.49@64.83,557.33 ccw(c38.59,586.32) U3.49@77.69,586.32 ; U3.49@71.54,549.91 ccw(c59,563.77) U3.49@77.69,563.77 ; C10.2 174.35,261.4 v1@382.69,261.4 ; C20.1@262.29,673 305.32,673 C13.1 390.16,644.33 398.19,636.3 v1(398.19,530) 398.19,429.4 v1(384.39,415.6) ; C20.1@268.09,667.22 cw(c282.06,653.25) 282.06,673 ; C20.1@268.09,676.85 ccw(c277.38,686.14) 277.38,673 ; C11.1 402.79,303.2 ; C14.1 v1(384.39,415.6) ; 320.68,657.64 cw(c307.38,644.33) C13.1@326.2,644.33 ; C13.1@323.06,655.26 ccw(c333.01,665.21) C13.1@333.01,651.14 ; C11.1@324.54,298.38 cw(c336.17,286.76) 336.17,303.2 cw(c336.17,319.64) C11.1@324.54,308.02 ; C14.1@324.94,410.78 cw(c336.57,399.16) 336.57,415.6 cw(c336.57,432.04) C14.1@324.94,420.42 ; C11.1@330.01,303.2 ccw(c330.01,394.28) 394.41,329.88 ccw(c374.19,350.1) 402.79,350.1 ; C13.1@339.79,639.52 cw(c351.42,627.89) 351.42,644.33 cw(c351.42,660.78) C13.1@339.79,649.15 ; 354.15,303.2 ccw(c354.15,370.14) v1@401.48,322.81 ; v1@376.61,407.82 ccw(c357.84,389.04) 357.84,415.6 ccw(c357.84,442.16) 376.61,423.38 ccw(c324.52,475.47) 398.19,475.47 ; 378.29,303.2 ccw(c378.29,346) v1@408.56,315.74 ; v1@383.68,416.31 ccw(c348.66,451.33) 398.19,451.33 ; v1@384.55,404.6 cw(c384.92,379.33) 402.79,397.2 ; v1@384.91,274.28 ccw(c341.75,317.44) v1@402.79,317.44 ; v1@390.41,522.22 cw(c371.64,503.44) 398.19,503.44 cw(c424.75,503.44) v1@405.97,522.22 ; v1@390.41,537.78 ccw(c371.64,556.56) 398.19,556.56 ccw(c424.75,556.56) v1@405.97,537.78 ; v1@390.76,409.24 ccw(c372.8,427.19) 398.19,427.19 ; v1@392.69,261.4 v1@382.69,261.4 ; v1@394.41,314.32 cw(c374.19,294.1) 402.79,294.1 ; v1@395.39,415.44 ccw(c420.66,415.07) 402.79,397.2 ; 402.43,303.2 ccw(c402.43,321.86) 415.63,308.66 ; 402.79,296.99 cw(c427.3,296.99) v1@409.97,314.32 ; 402.79,347.21 ccw(c427.3,347.21) v1@409.97,329.88 ; 664.49,261.4 v1@683.04,279.95 ; v1@672.51,272.88 ccw(c647.09,298.3) U2.1@683.04,298.3 ; U2.1@676.17,290.61 cw(c671.34,279.95) v1@683.04,279.95 ; U2.1@683.04,285.01 ccw(c700.21,285.01) v1@688.07,272.88 ; U2.1 v1@683.04,279.95 ; U2.1@689.92,290.61 ccw(c694.75,279.95) v1@683.04,279.95 ; R4.1 958.19,970.3 1031.09,1043.2 1031.09,1393.55 ; R4.1@912.04,965.48 cw(c923.67,953.86) 923.67,970.3 cw(c923.67,986.74) R4.1@912.04,975.12 ; Q2.2@1022.1,1457.56 cw(c1000.39,1435.86) 1031.09,1435.86 cw(c1061.79,1435.86) Q2.2@1040.08,1457.56 ; 1031.09,1331.53 cw(c1093.11,1331.53) R28.1@1049.25,1375.38 ; 1031.09,1355.67 cw(c1068.97,1355.67) R28.1@1042.18,1382.45 ; 1031.09,1379.81 cw(c1044.82,1379.81) R28.1@1035.11,1389.53 ; 1031.09,1380.59 ccw(c1044.82,1380.59) R28.1@1035.11,1370.87 ; 1031.09,1404.73 ccw(c1068.97,1404.73) R28.1@1042.18,1377.95 ; 1031.09,1428.87 ccw(c1093.11,1428.87) R28.1@1049.25,1385.02 ; Q2.2 1031.09,1393.55 ; R28.1 1031.09,1393.55 ; -1029.21,69 -1057.81,97.6 -1057.81,336 -1024.8,369 ; U6.1 -394.41,381 ; C23.2 C23.2@-408.81,555.2 ; C23.2@-408.81,555.2 C23.2@-394.41,569.6 ; C23.2@-408.81,555.2 C23.2@-394.41,555.2 ; -394.41,381 C23.2@-394.41,555.2 ; C23.2@-394.41,555.2 C23.2@-394.41,569.6 ; C23.2@-394.41,555.2 C21.1@-269.21,555.2 ; v1@382.69,261.4 402.79,281.5 402.79,303.2 ; v1(384.39,415.6) 402.79,397.2 ; 402.79,303.2 402.79,397.2
  Bottom Layer w20: C50.2 R38.2@-137.6,2105.6 ; C50.2@-241.28,2098.75 cw(c-224.75,2082.22) -224.75,2105.6 cw(c-224.75,2128.98) C50.2@-241.28,2112.45 ; -172.34,2069.86 cw(c-139.08,2036.59) R38.2@-137.54,2083.61 ; -171.19,2105.6 cw(c-171.19,2071.01) R38.2@-146.73,2095.47 ; -168.78,2105.6 ccw(c-168.78,2136.78) R38.2@-146.73,2114.73 ; UX1.2@-168.41,1988.76 cw(c-28.63,1988.76) R38.2@-127.47,2087.59 ; -168.41,2037.04 cw(c-76.91,2037.04) R38.2@-141.61,2101.74 ; R38.2 -168.41,2073.79 UX1.2 -168.41,1949.5 -153.11,1934.2 -103.01,1934.2 -29.02,1860.21 R58.2 ; -55.33,1886.53 ccw(c-24.68,1917.18) R58.2@-24.68,1873.83 ; R58.2@-44.87,1876.06 cw(c-60.73,1860.21) R58.2@-38.3,1860.21 ; C12.1 C12.1@21.85,-219.68 ; C7.2 C5.2 C12.1@21.85,-219.68 ; v1(61,-269) 52.8,-269 21.85,-238.05 C12.1@21.85,-219.68
  Bottom Layer w40: JP2.1 -805.91,769.2 ; JP2.1@-946.9,758.29 cw(c-920.55,731.94) -920.55,769.2 cw(c-920.55,806.46) JP2.1@-946.9,780.11 ; -799.51,-213.85 cw(c-734.05,-213.85) pad.1@-780.34,-167.57 ; -799.51,-77.15 ccw(c-734.05,-77.15) pad.1@-780.34,-123.43 ; -799.51,571.6 cw(c-732.01,571.6) pad.0@-779.74,619.33 ; -799.51,711.2 ccw(c-732.01,711.2) pad.0@-779.74,663.47 ; v2(-729.23,1912.88) C51.2 ; v2(200.61,1514.08) C31.2 ; 520.19,673.7 528.89,665 C16.1 pad.3@803.19,665 ; v2(543.99,1909.3) C30.2 ; 746.18,665 cw(c746.18,615.59) pad.3@781.12,650.53 ; 751.39,-316.5 -753.41,-315.2 -765.37,-315.2 -789.87,-290.7 -799.51,-290.7 -799.51,799.1 -789.41,809.2 794.49,809.2 ; 770.9,-309.19 808.09,-272 808.09,795.6 ; pad.3@781.12,620.53 cw(c716.01,555.41) 808.09,555.41 ; pad.3@781.12,664.67 ccw(c716.01,729.78) 808.09,729.78 ; pad.2@782.92,-168.97 cw(c722.15,-229.74) 808.09,-229.74 ; pad.2@782.92,-124.83 ccw(c722.15,-64.06) 808.09,-64.06
  other v1: -24.9,-24.7 25.9,-24.3 -27.3,27.5 25.9,28 680.29,265.1 392.69,266.5 -40.6,272.9 402.19,322.1 -353.71,329.6 -389.71,398.2 54.09,431.4 -70.31,433.5 -6.81,433.1 57.69,502.9 -5.81,504 -68.51,505.2 58.79,564 -4.21,566.2 -72.81,568.1
  other v2: -772.71,995.9 -772.71,1223.6 607.89,1368 -775.51,1529.1 -456.71,1536.8 616.49,1676.2
  other v3: -145.67,-59.06 -118.11,-59.06 118.11,-39.37 145.67,-39.37 -145.67,39.37 -118.11,39.37 118.11,59.06 145.67,59.06
GREEN_LED: U3.12
KEY: U3.42
NetB1_2: B1.2 Q2.3 | length 444.3
  Bottom Layer w40: B1.2@715.59,1573.1 1055.45,1573.1 Q2.3 ; B1.2@726.49,1551.49 cw(c778.66,1499.31) 778.66,1573.1 ; 1044.9,1573.1 cw(c1044.9,1537.45) Q2.3@1070.11,1562.66
NetC1_1: C1.1 R2.1 | length 42.6
  Bottom Layer w12: R2.1@73.55,214.5 C1.1
NetC4_2: C4.2 R2.2 R3.2 U1.5 | length 134
  Bottom Layer w11.8: U1.5 R2.2@29.53,212.78
NetC15_2: C15.2 R10.2 | length 52.5
  Bottom Layer w20: C15.2@-128.66,220.71 R10.2
NetC17_1: C17.1 R8.1 U1.2 | length 94.4
  Bottom Layer w11.8: U1.2 C17.1@-29.53,173.12
NetC17_2: C17.2 R8.2 U1.1 | length 107.7
  Bottom Layer w11.8: C17.2 -75.32,119.62 -49.21,93.51 U1.1
NetC18_1: C18.1 U3.22 | length 300.6
  Bottom Layer w10: C18.1 -155.44,314.4 -92.01,314.4 -79.81,326.6 U3.22 ; C18.1@-268.22,421.36 cw(c-268.22,407.29) C18.1@-258.28,417.24 ; C18.1@-261.41,428.17 ccw(c-242.59,428.17) -255.9,414.86
NetC23_1: C23.1 Q1.1 R16.2 | length 277.1
  Bottom Layer w30: -606.61,604.1 ccw(c-538.34,604.1) Q1.1@-586.61,555.82 ; -606.61,630.7 -606.61,581.8 ; -600.11,575.31 cw(c-621.52,553.9) Q1.1@-591.25,553.9 ; Q1.1@-587.76,556.51 cw(c-580.21,581.8) -606.61,581.8 ; C23.1 -580.01,555.2 -606.61,581.8
NetC31_1: C31.1 D9.2 D11.1 UX.5 | length 1218.6
  Top Layer w40: v2(319.89,1677) 355.69,1641.2 D11.1
  Bottom Layer w20: UX.5 303.89,2070.3 322.69,2051.5 D9.2@322.69,1752.2 ; D9.2@295.55,1771.18 ccw(c230.03,1836.7) 322.69,1836.7 ; D9.2@309.7,1757.04 ccw(c278.32,1788.42) D9.2@322.69,1788.42 ; 322.69,1792.5 ccw(c352.84,1792.5) D9.2@331.52,1771.18
  Bottom Layer w40: D9.2@302.62,1742.29 cw(c275.18,1714.84) 313.99,1714.84 ; C31.1 313.99,1634.12 D9.2@313.99,1754.7 ; C31.1@303.33,1628.75 ccw(c277.58,1654.49) v2@313.99,1654.49 ; 313.99,1650.69 cw(c346.21,1650.69) v2@323.43,1673.46 ; 313.99,1703.31 ccw(c346.21,1703.31) v2@323.43,1680.54 ; 313.99,1717.04 cw(c349.7,1717.04) D9.2@324.45,1742.29
NetC51_1: C51.1 D19.2 D21.1 UX1.5 | length 1619.1
  Top Layer w40: v2@-456.61,1815.7 -119.31,1815.7 122.39,1574 D21.1
  Bottom Layer w20: D19.2@-514.01,1817.8 D19.2@-506.21,1817.8 ; v2@-446.11,1817.8 -185.31,1817.8 -168.41,1834.7 UX1.5 ; v2@-435.5,1805.09 cw(c-404.82,1774.42) -404.82,1817.8 ; v2@-435.5,1826.31 ccw(c-414.96,1846.84) -414.96,1817.8
  Bottom Layer w40: C51.1 -632.73,1820.9 v2@-446.11,1820.9 ; C51.1@-637.46,1810.87 cw(c-613.25,1786.66) -613.25,1820.9 ; -545.51,1820.9 cw(c-545.51,1780.76) D19.2@-517.12,1809.14 ; D19.2@-495.3,1809.14 cw(c-466.91,1780.76) v2@-466.91,1820.9 ; -470.73,1820.9 cw(c-470.73,1791.07) v2@-449.64,1812.16
  other v2: -446.11,1815.7
NetD1_K: D1.K R4.2 | length 125.4
  Bottom Layer w20: D1.K R4.2@871.86,972.2 ; D1.K@783.88,966.33 cw(c798.06,952.14) 798.06,972.2 cw(c798.06,992.26) D1.K@783.88,978.07
NetD9_1: D9.1 L2.2 UX.1 | length 291.6
  Bottom Layer w60: D9.1@133.26,1758.84 133.26,2010.66 ; 133.26,1792.85 ccw(c183.9,1792.85) D9.1@148.09,1757.04
NetD11_2: D11.2 D12.1 | length 192.3
  Top Layer w40: D12.1@229.69,1073.9 D11.2@229.69,1266.2
NetD12_2: D12.2 D15.1 | length 170.8
  Top Layer w40: D15.1@354.19,902.6 D12.2
NetD15_2: D15.2 D16.1 | length 504.3
  Top Layer w40: D16.1 -53.5,1082.39 -16.31,1045.2 99.19,1045.2 227.89,916.5 D15.2 ; 180.45,963.94 ccw(c227.89,1011.39) D15.2@227.89,944.29
NetD19_1: D19.1 L3.2 UX1.1 | length 280
  Bottom Layer w60: D19.1 -226.2,1985.41
NetD21_2: D21.2 D22.1 | length 105.7
  Top Layer w60: D22.1 D21.2@-6.51,1337
NetD22_2: D22.2 D25.1 | length 307
  Top Layer w40: D25.1@-399.91,1172.4 -399.91,1302.3 -365.21,1337 D22.2
NetD25_2: D25.2 D26.1 | length 220.2
  Top Layer w40: D26.1@-286.97,1041.34 ccw(c-312.47,1066.84) -276.4,1066.84 ; D26.1@-276.4,986.61 D25.2
NetQ2_1: Q2.1 R21.2 R28.2 | length 297.5
  Bottom Layer w12: R21.2 1105.89,1302.66 Q2.1 ; R21.2@1087.09,1289.66 ccw(c1087.09,1303.69) 1097.01,1293.77 ccw(c1106.93,1283.85) R21.2@1092.9,1283.85 ; R28.2 1105.29,1380.2 ; R28.2@1091.85,1376.09 cw(c1101.77,1366.17) 1101.77,1380.2 cw(c1101.77,1394.23) R28.2@1091.85,1384.31 ; Q2.1@1097.61,1458.27 cw(c1077.61,1438.27) 1105.89,1438.27 cw(c1134.18,1438.27) Q2.1@1114.18,1458.27
NetR10_1: R10.1 U1.3 | length 173.9
  Bottom Layer w10: R10.1 -7.31,220.71 -0.8,214.2 -0.8,106.7 -9.84,97.66 U1.3
NetR31_1: R31.1 UX.4 | length 134.2
  Bottom Layer w20: UX.4 R31.1@364.83,2107.7 ; 343.05,2107.7 ccw(c343.05,2134.68) R31.1@362.12,2115.6
NetR51_1: R51.1 UX1.4 | length 142.3
  Bottom Layer w15: R51.1@-131.01,1764.36 UX1.4 ; -131.01,1793.88 ccw(c-93.9,1793.88) R51.1@-120.14,1767.64
NRST: C11.2 R1.1 U3.7 | length 366.5
  Bottom Layer w10: U3.7 164.59,485.8 224.19,426.2 224.19,393.2 259.19,358.2 R1.1 286.26,357.9 C11.2 ; C11.2@281.44,309 ccw(c269.82,320.63) 286.26,320.63 ccw(c302.7,320.63) C11.2@291.08,309 ; R1.1@281.74,352.4 cw(c270.84,341.5) 286.26,341.5 ; R1.1@281.74,353.38 ccw(c270.12,341.76) 270.12,358.2 ccw(c270.12,374.64) R1.1@281.74,363.02 ; 286.26,340.05 cw(c303.73,340.05) R1.1@291.38,352.4
PWM_O: R31.2 U3.45 | length 2645.9
  SIGNAL w15: v1(201.32,689.53) 701.42,689.53 899.09,887.2 899.09,1692.5 482.99,2108.6 v4(473.59,2108.6) ; v1@207.33,683.52 cw(c221.84,669.01) 221.84,689.53 cw(c221.84,710.05) v1@207.33,695.54 ; v4@473.59,2096.1 cw(c473.59,2043.23) 510.98,2080.61
  Bottom Layer w12: U3.45 38.29,684.4 51.09,697.2 193.66,697.2 v1(201.32,689.53) ; 158.67,697.2 cw(c158.67,646.88) v1@194.25,682.46
  Bottom Layer w15: R31.2 471.89,2110.3 v4(473.59,2108.6) ; R31.2@439.31,2110.3 cw(c439.31,2074.32) v4@464.75,2099.76 ; R31.2@441.43,2103.23 cw(c458.5,2086.16) 458.5,2110.3 cw(c458.5,2134.44) R31.2@441.43,2117.37 ; R31.2@447.52,2110.3 ccw(c447.52,2134.67) v4@464.75,2117.44
PWM_O_1: R51.2 U3.43 | length 1808.2
  SIGNAL w15: -308.37,690.66 cw(c-330.73,668.3) v1@-299.11,668.3 ; v1(-290.61,668.3) -290.61,672.9 -330.61,712.9 -330.61,931.8 -227.71,1034.7 -122.31,1034.7 -54.91,1102.1 -54.91,1633.3 v4@-93.41,1671.8 ; v4@-84.01,1652.5 cw(c-84.01,1628.6) -67.11,1645.5 ; v4@-71.51,1665 ccw(c-35.05,1665) -60.83,1639.22
  Bottom Layer w10: v1(-290.61,668.3) -282.61,676.3 -14.21,676.3 -1.11,663.2 U3.43 ; v1@-289.9,667.59 cw(c-268.88,646.57) -268.88,676.3 ; v1@-282.83,660.52 cw(c-244.74,622.43) -244.74,676.3
  Bottom Layer w15: R51.2@-127.21,1683.64 cw(c-127.21,1651.37) -104.39,1674.19 ; R51.2 -123.84,1693.64 -95.21,1665 v4(-84.01,1665) ; R51.2@-118.24,1688.03 ccw(c-91.47,1714.81) v4@-85.86,1677.36 ; R51.2@-117.21,1693.64 ccw(c-101.19,1693.64) R51.2@-112.52,1682.31
RED_LED: U3.11
SWCLK: JP2.2 U3.37 | length 1098.1
  SIGNAL w15: JP2.2 -907.61,669.2 ; JP2.2@-934.07,654.48 cw(c-907.61,638.06) -907.61,669.2 ; JP2.2@-934.07,683.92 ccw(c-907.61,700.34) -907.61,669.2 ; v1@-343.82,613.49 ccw(c-358.33,598.98) -358.33,619.5 ccw(c-358.33,640.02) v1@-343.82,625.51 ; v1(-337.81,619.5) -585.11,619.5 -697.51,731.9 -844.91,731.9 -907.61,669.2
  Bottom Layer w10: v1(-337.81,619.5) -325.91,631.4 U3.37 ; v1@-337.1,618.79 cw(c-306.66,588.36) -306.66,631.4 ; v1@-330.03,611.72 cw(c-282.52,564.21) -282.52,631.4
SWDIO: JP2.3 U3.34 | length 1037
  SIGNAL w15: JP2.3@-959.51,560.2 -220.01,560.2 -213.31,564.2 v1(-212.11,564.2) ; JP2.3@-948.66,578.34 ccw(c-904.86,622.15) -904.86,560.2 ; JP2.3@-938.06,549.45 cw(c-912.1,523.49) -912.1,560.2 ; JP2.3@-938.06,588.95 ccw(c-868.64,658.36) -868.64,560.2 ; -242.29,560.2 ccw(c-242.29,594.38) v1@-218.12,570.21
  Bottom Layer w10: v1@-212.11,564.5 U3.34 ; v1@-204.33,556.42 cw(c-184.83,536.92) -184.83,564.5 ; v1@-204.33,571.98 ccw(c-186.28,590.03) -186.28,564.5
USART_RX: JP1.2 U3.31 | length 1137.1
  SIGNAL w15: JP1.2 -737.4,269 -490.11,516.3 v1(-210.81,516.3) ; JP1.2@-937.76,249.25 cw(c-890.07,201.57) -890.07,269 cw(c-890.07,336.44) JP1.2@-937.76,288.76 ; v1@-216.82,510.29 ccw(c-231.33,495.78) -231.33,516.3 ccw(c-231.33,536.82) v1@-216.82,522.31
  Bottom Layer w10: v1(-210.81,516.3) -199.91,505.4 U3.31 ; v1@-210.1,517.01 ccw(c-182.08,545.03) -182.08,505.4 ; v1@-203.03,524.08 ccw(c-157.94,569.17) U3.31@-157.94,505.4
USART_TX: JP1.3 U3.30 | length 1215.2
  SIGNAL w15: JP1.3@-967.61,175.9 -756.71,175.9 -458.61,474 v1(-210.61,474) ; JP1.3@-948.36,159.86 cw(c-909.64,121.13) -909.64,175.9 ; JP1.3@-937.76,149.25 cw(c-873.42,84.92) -873.42,175.9 ; JP1.3@-937.76,188.76 ccw(c-906.72,219.79) -906.72,175.9 ; v1@-216.62,467.99 ccw(c-231.13,453.48) -231.13,474 ccw(c-231.13,494.52) v1@-216.62,480.01
  Bottom Layer w10: v1@-210.81,477.5 -202.51,485.8 U3.30 ; v1@-209.9,473.29 cw(c-179.71,443.1) -179.71,485.8 ; v1@-202.83,466.22 cw(c-155.56,418.96) U3.30@-155.56,485.8
XTALA: C13.2 R7.1 U3.5 Y1.1 | length 494.4
  Bottom Layer w10: U3.5 188.99,525.1 248.09,584.2 332.39,584.2 ; 193.82,529.93 cw(c211.26,512.49) R7.1@215.56,536.77 ; R7.1@203.79,533.63 cw(c218.91,533.63) R7.1@208.22,544.32 ; R7.1@207.39,543.5 cw(c215.35,535.54) 217.31,546.62 ; R7.1@213.79,533.63 cw(c253.05,533.63) 225.29,561.39 ; R7.1@223.79,533.63 cw(c287.19,533.63) 242.36,578.47 ; Y1.1@325.81,551.83 ccw(c307.46,570.18) 333.41,570.18 ccw(c359.36,570.18) Y1.1@341.01,551.83 ; C13.2@328.19,606.05 cw(c315.59,593.45) 333.41,593.45 ; Y1.1 333.41,610.29 C13.2 ; 333.41,595.4 cw(c348.47,595.4) C13.2@337.82,606.05
XTALB: C14.2 R7.2 U3.6 Y1.3 | length 495.7
  Bottom Layer w10: U3.6 267.91,505.4 Y1.3 C14.2@286.17,416.09 ; 185.93,505.4 cw(c185.93,471.09) R7.2@210.19,495.35 ; R7.2@220.9,505.4 cw(c220.9,423.83) Y1.3@278.57,481.51 ; R7.2@221.79,495.35 cw(c246.05,471.09) 246.05,505.4 ; 245.04,505.4 cw(c245.04,447.97) Y1.3@285.64,488.58 ; 269.18,505.4 cw(c269.18,472.12) Y1.3@292.71,495.65 ; Y1.3@278.57,477.57 cw(c260.22,459.22) 286.17,459.22 cw(c312.12,459.22) Y1.3@293.77,477.57 ; C14.2@281.84,421.4 ccw(c271.39,431.85) 286.17,431.85 ; 286.17,434.2 ccw(c304.28,434.2) C14.2@291.48,421.4
pads on no net: U1.9 U1.21 U3.2 U3.3 U3.4 U3.13 U3.14 U3.16 U3.17 U3.18 U3.19 U3.21 U3.25 U3.26 U3.27 U3.28 U3.29 U3.32 U3.33 U3.38 U3.39 U3.40 U3.41 Y1.2 Y1.4
copper on no net: | length 655.8
  Top Layer w15.75: -433.07,226.38 -433.07,68.9 -354.33,-9.84 -295.28,-9.84 ; 295.28,9.84 354.33,9.84 433.07,88.58 433.07,246.06

## Polygon pours and split planes (outlines as drawn)
GND on Top Layer "GND_L01_P006" (solid, remove dead copper, pour order 6): -1740.2,2516.1 1742.8,2516.1 1742.8,-652.4 -1740.2,-652.4
GND on GND "Top Layer-No Net" (solid, remove dead copper, pour order 1): -1590.71,2444.2 1714.89,2444.2 1714.89,-620.2 1696.99,-638.1 -1599.61,-638.1 -1599.61,2435.3 -1581.81,2453.1
GND on SIGNAL "Top Layer-No Net" (solid, remove dead copper, pour order 2): -861.91,2395.4 -857.31,2390.8 1467.09,2390.8 1467.09,-547.9 1480.89,-561.7 1476.39,-566.2 -1600.01,-566.2 -1600.01,2257.8 -1462.41,2395.4 -861.91,2395.4
GND on Bottom Layer "GND_L04_P005" (solid, remove dead copper, pour order 5): -2024.9,2821.1 1975.2,2821.1 1979.8,2816.5 1979.8,-705 1975.3,-700.5 -2038.5,-700.5

## Keep-outs
Keep-Out Layer:
  circle w10: c510.59,934.5 r25.59
  circle w10: c-513.01,934.5 r25.59
  circle w10: c-1.31,934.5 r45.28
  lines w10: -1426.69,474.28 -1426.69,1390.12 cw(c-2.11,933.2) -464.16,2356.12 ; -1424.43,471.74 ccw(c-1.51,933.8) -458.43,-490.78 ; -461.23,2358.48 454.61,2358.48 cw(c-2.31,933.9) 1420.61,1395.96 ; -454.91,-489.2 460.93,-489.2 ; 460.65,-488.32 ccw(c-1.41,934.6) 1423.17,477.68 1423.17,1393.52

## Other copper
Top Layer:
  rectangle: -295.28,-26.57 -118.11,6.89
  region: 295.28,26.57 118.11,26.57 118.11,-6.89 295.28,-6.89
  region: -612.2,494.09 -253.94,494.09 -253.94,226.38 -612.2,226.38
  region: 612.2,513.78 253.94,513.78 253.94,246.06 612.2,246.06
  pour cut-out: -786.2,796 -784.2,798 787.3,798 788.1,797.2 788.1,-303 787.3,-302.2 -787.8,-302.2
GND:
  pour cut-out: 82.68,9.84 ccw(c118.11,9.84) 118.11,-25.59 ccw(c118.11,9.84) 153.54,9.84 ccw(c118.11,9.84) 118.11,45.28 ccw(c118.11,9.84)
  pour cut-out: -153.54,-9.84 ccw(c-118.11,-9.84) -118.11,-45.28 ccw(c-118.11,-9.84) -82.68,-9.84 ccw(c-118.11,-9.84) -118.11,25.59 ccw(c-118.11,-9.84)
SIGNAL:
  pour cut-out: 82.68,9.84 ccw(c118.11,9.84) 118.11,-25.59 ccw(c118.11,9.84) 153.54,9.84 ccw(c118.11,9.84) 118.11,45.28 ccw(c118.11,9.84)
  pour cut-out: -153.54,-9.84 ccw(c-118.11,-9.84) -118.11,-45.28 ccw(c-118.11,-9.84) -82.68,-9.84 ccw(c-118.11,-9.84) -118.11,25.59 ccw(c-118.11,-9.84)
Bottom Layer:
  pour cut-out: 116.59,632.8 114.09,630.3 114.09,352.6 -133.31,352.6 -134.11,351.8 -140.51,358.2 -140.51,632.8
  region: -118.11,9.83 -106.3,9.83 -98.43,-3.94 -78.74,-3.94 -78.74,-15.75 -98.43,-15.75 -106.3,-29.54 -118.11,-29.54
  region: 118.11,-9.83 106.3,-9.83 98.43,3.94 78.74,3.94 78.74,15.75 98.43,15.75 106.3,29.54 118.11,29.54
  pour cut-out: -153.54,-9.83 ccw(c-118.11,-9.83) -118.11,-45.27 ccw(c-118.11,-9.83) -82.68,-9.83 ccw(c-118.11,-9.83) -118.11,25.6 ccw(c-118.11,-9.83)
  pour cut-out: 82.68,9.86 ccw(c118.11,9.86) 118.11,-25.57 ccw(c118.11,9.86) 153.54,9.86 ccw(c118.11,9.86) 118.11,45.3 ccw(c118.11,9.86)

## Silkscreen, mask and mechanical layers (free items; w line width, h text height)
Top Overlay:
  lines w10: 788.44,-145.96 798.55,-145.96 ; 788.54,641.44 798.55,641.44
  text "GND" at -1134.21,779.7 h60
  text "Phosense" at 899.54,777.22 h80
  text "CLK" at -1132.21,650 h60
  text "DIO" at -1124.21,551.3 h60
  text "3.3V" at -1135.11,452.5 h60
  text "GND" at -1144.11,347.7 h60
  text "RX" at -1126.21,248.9 h60
  text "TX" at -1131.51,154.6 h60
  text "GND" at -1128.01,54 h60
  text "5V" at -1121.41,-24.2 h60
Bottom Overlay:
  circle w10: c363.73,549.7 r10.29
  circle w10: c163.99,637.4 r22.56
  circle w20: c155.49,1987.7 r18.81
  circle w20: c-252.91,1980.5 r15.56
  lines w10: -788.11,-301.94 -788.11,798.93 786.69,798.93 ; -786.61,-303.44 788.19,-303.44 788.19,797.43
  lines w20: 567.58,761 603.39,761
  text "GND" at -1022.11,750.5 h60
  text "CLK" at -1019.71,648.2 h60
  text "DIO" at -1015.31,551.6 h60
  text "3.3V" at -1022.31,453 h60
  text "GND" at -1035.41,348.6 h60
  text "RX" at -1060.31,248.9 h60
  text "TX" at -1067.31,156.1 h60
  text "GND" at -1014.21,53.2 h60
  text "5V" at -1057.51,-24.6 h60
Bottom Paste:
  lines w40: -796.31,-295.5 -776.21,-315.6 763.19,-315.6 802.89,-275.9 802.89,809.5 -786.31,809.5 -796.31,799.5 -796.31,-295.5
Top Solder:
  rectangle: -787.5,-301.9 787.4,796.7
Bottom Solder:
  lines w40: -796.31,-302.4 -780.81,-317.9 761.59,-317.9 806.39,-273.1 806.39,796.4 793.29,809.5 -796.11,809.5 -796.31,809.3 -796.31,-302.4